# EAGLE board Open-Source_Control_V2_R2 (EAGLE 9.3.0), part 1 of 3
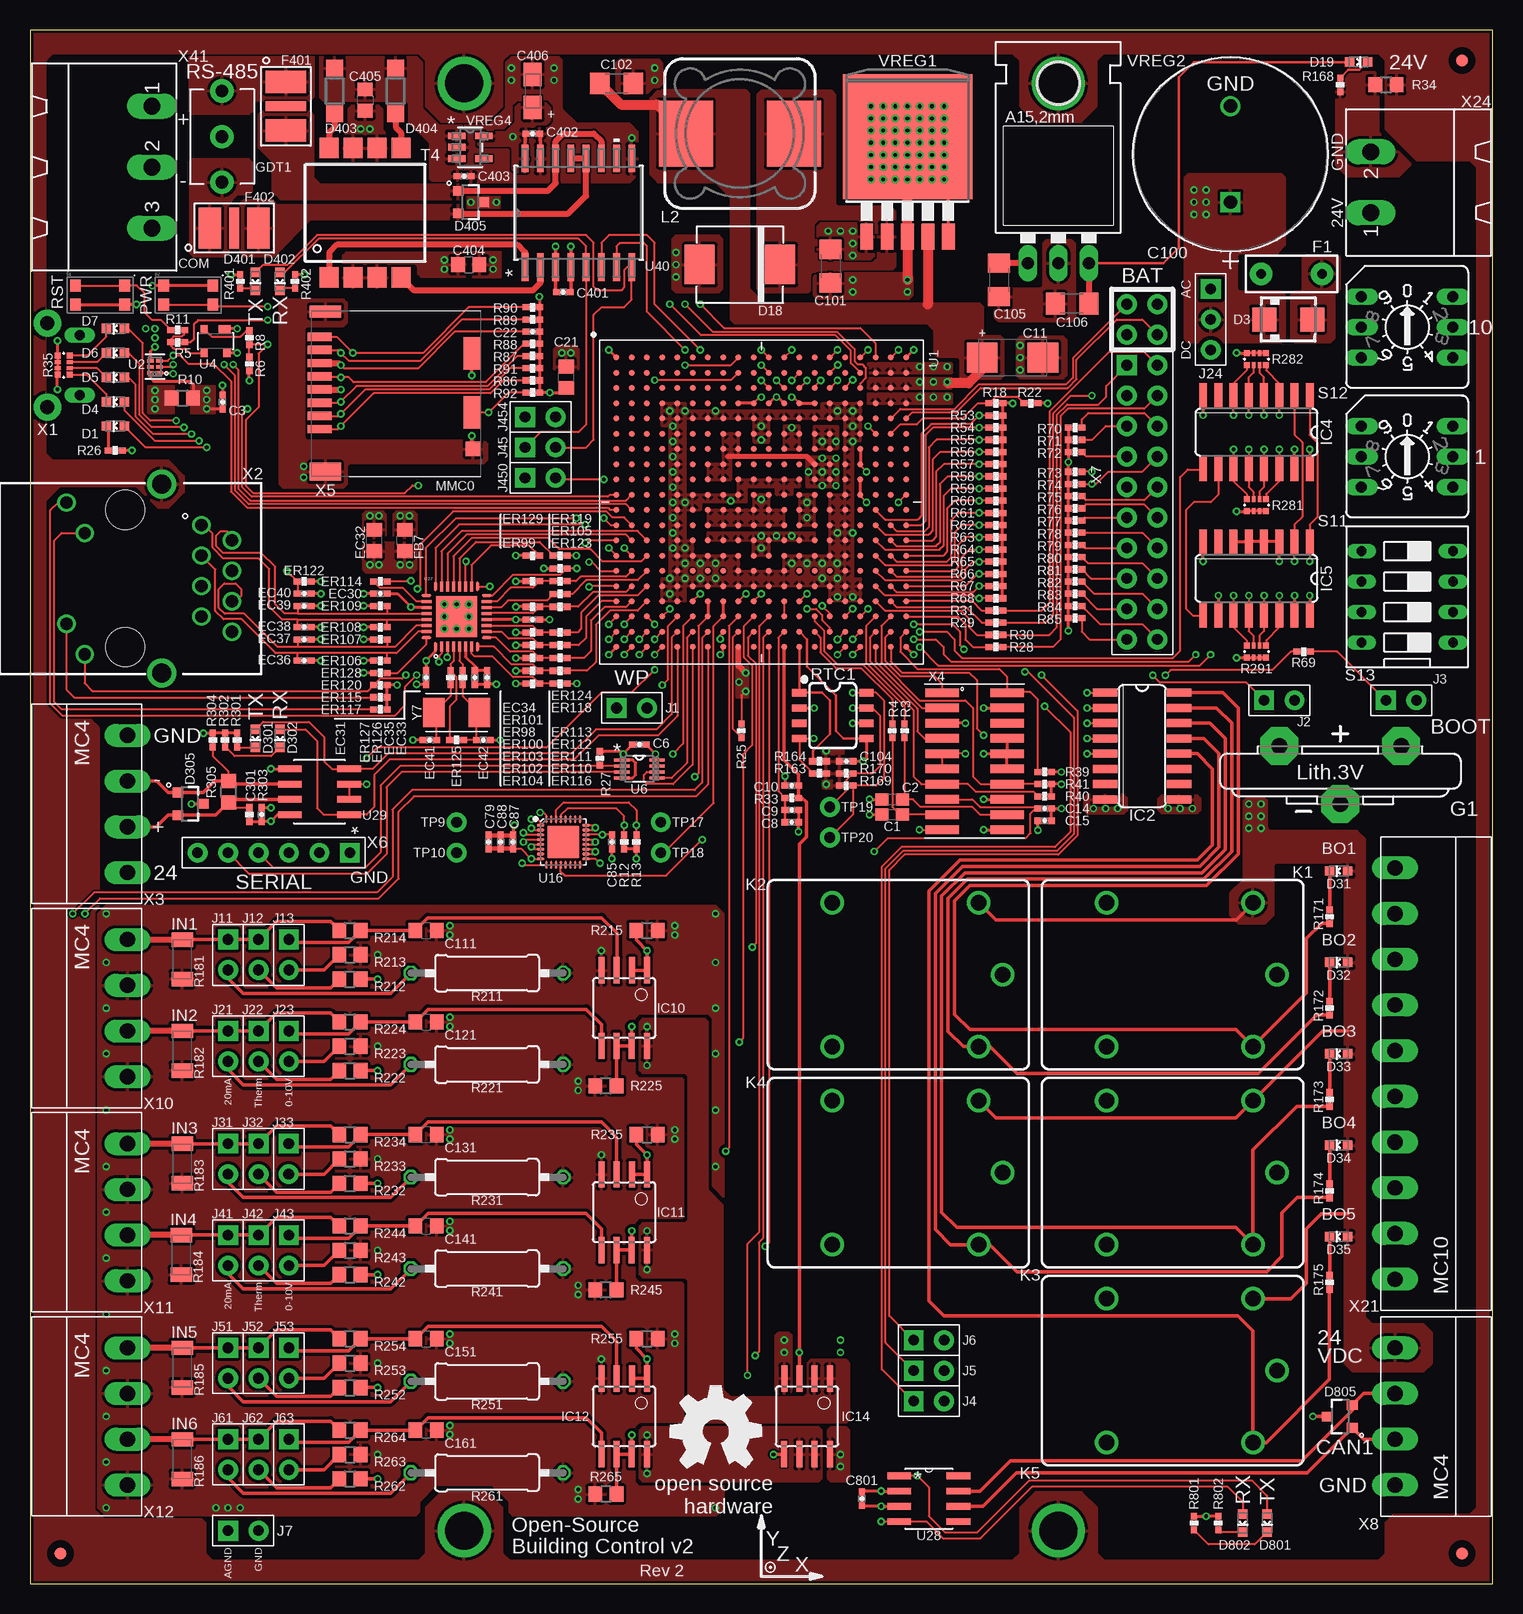
[diagram p0: board, top side]
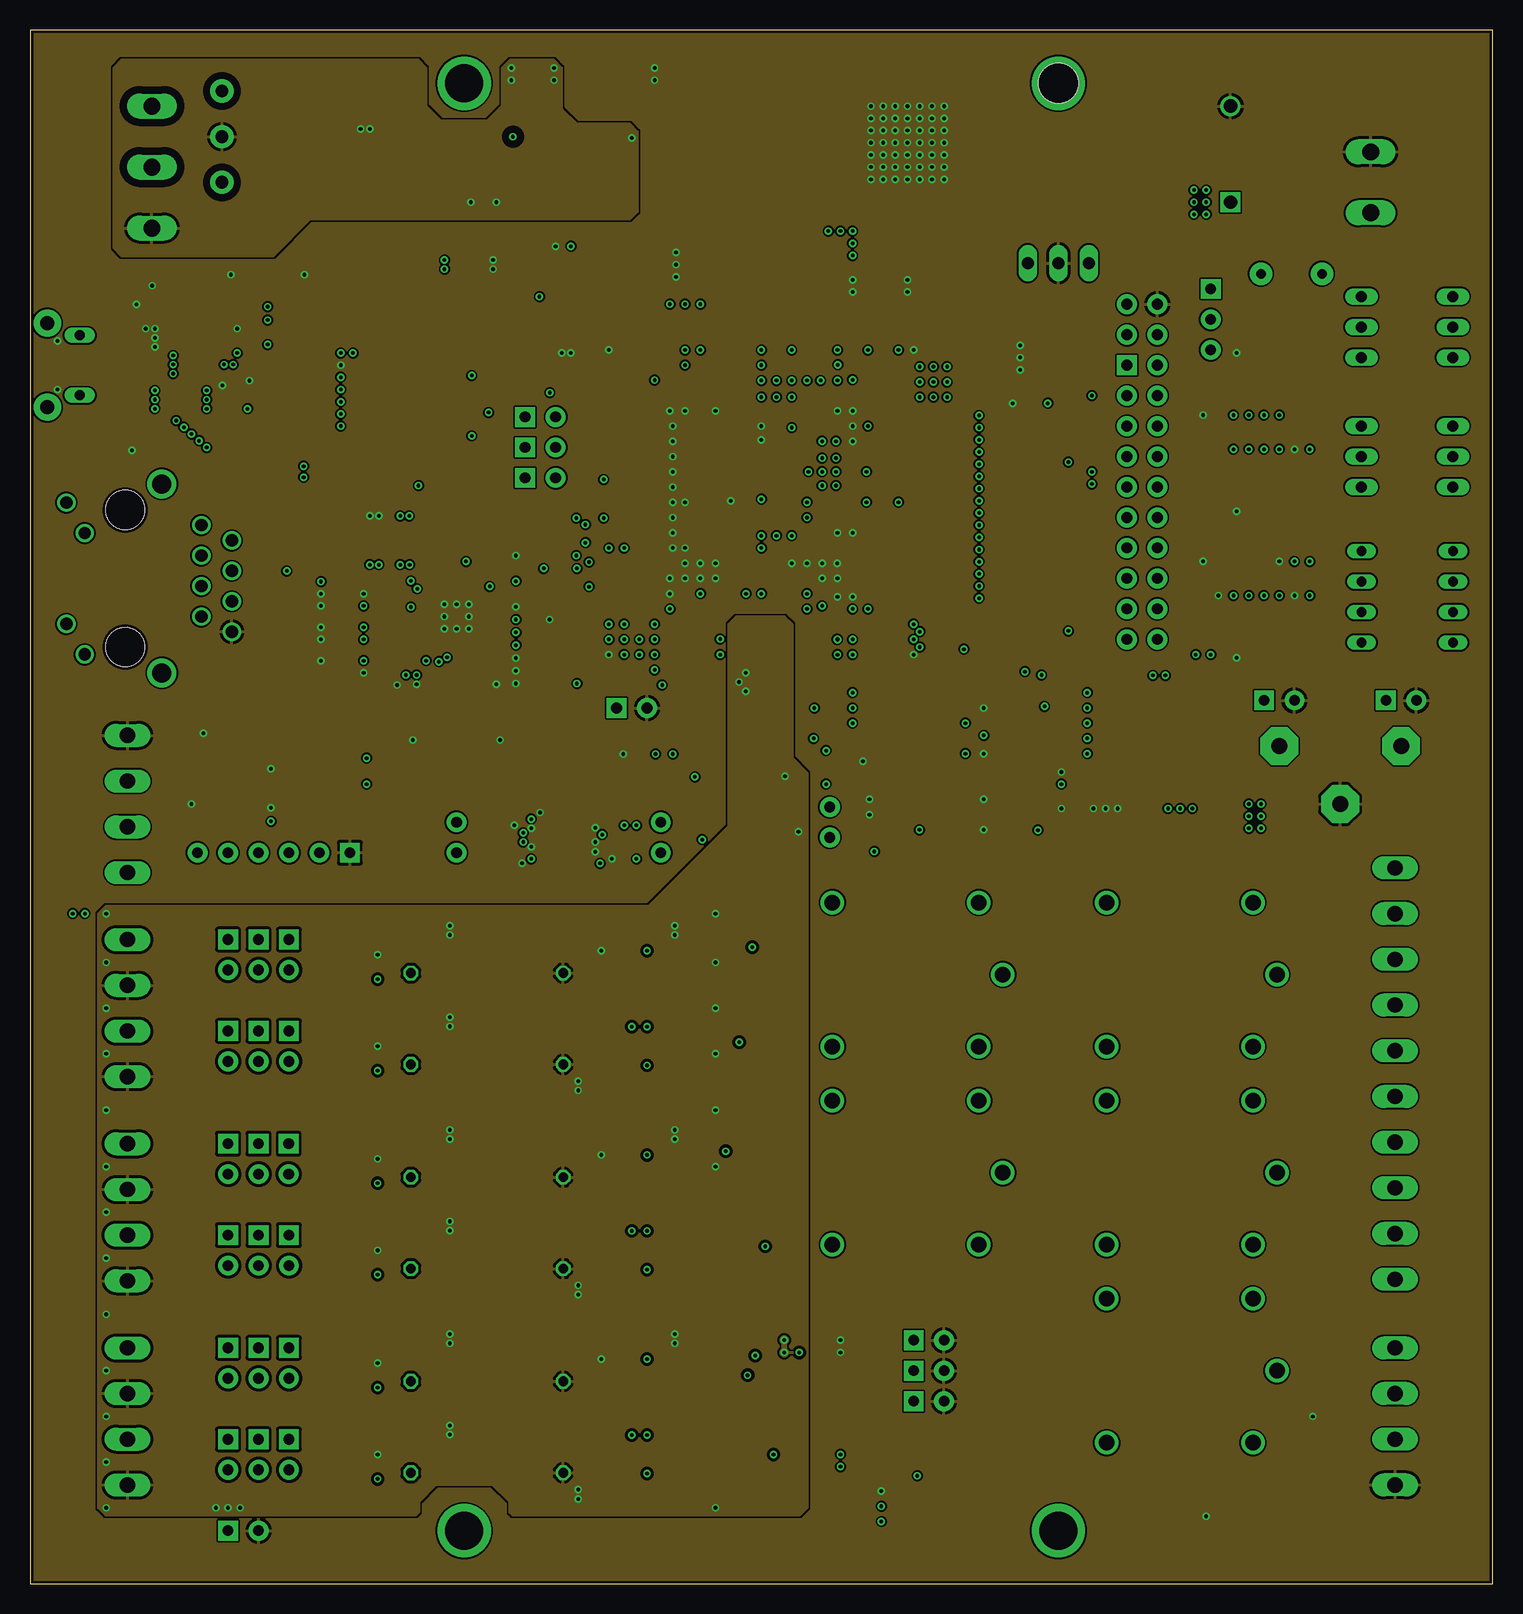
[diagram p1: board, inner layer Route2]
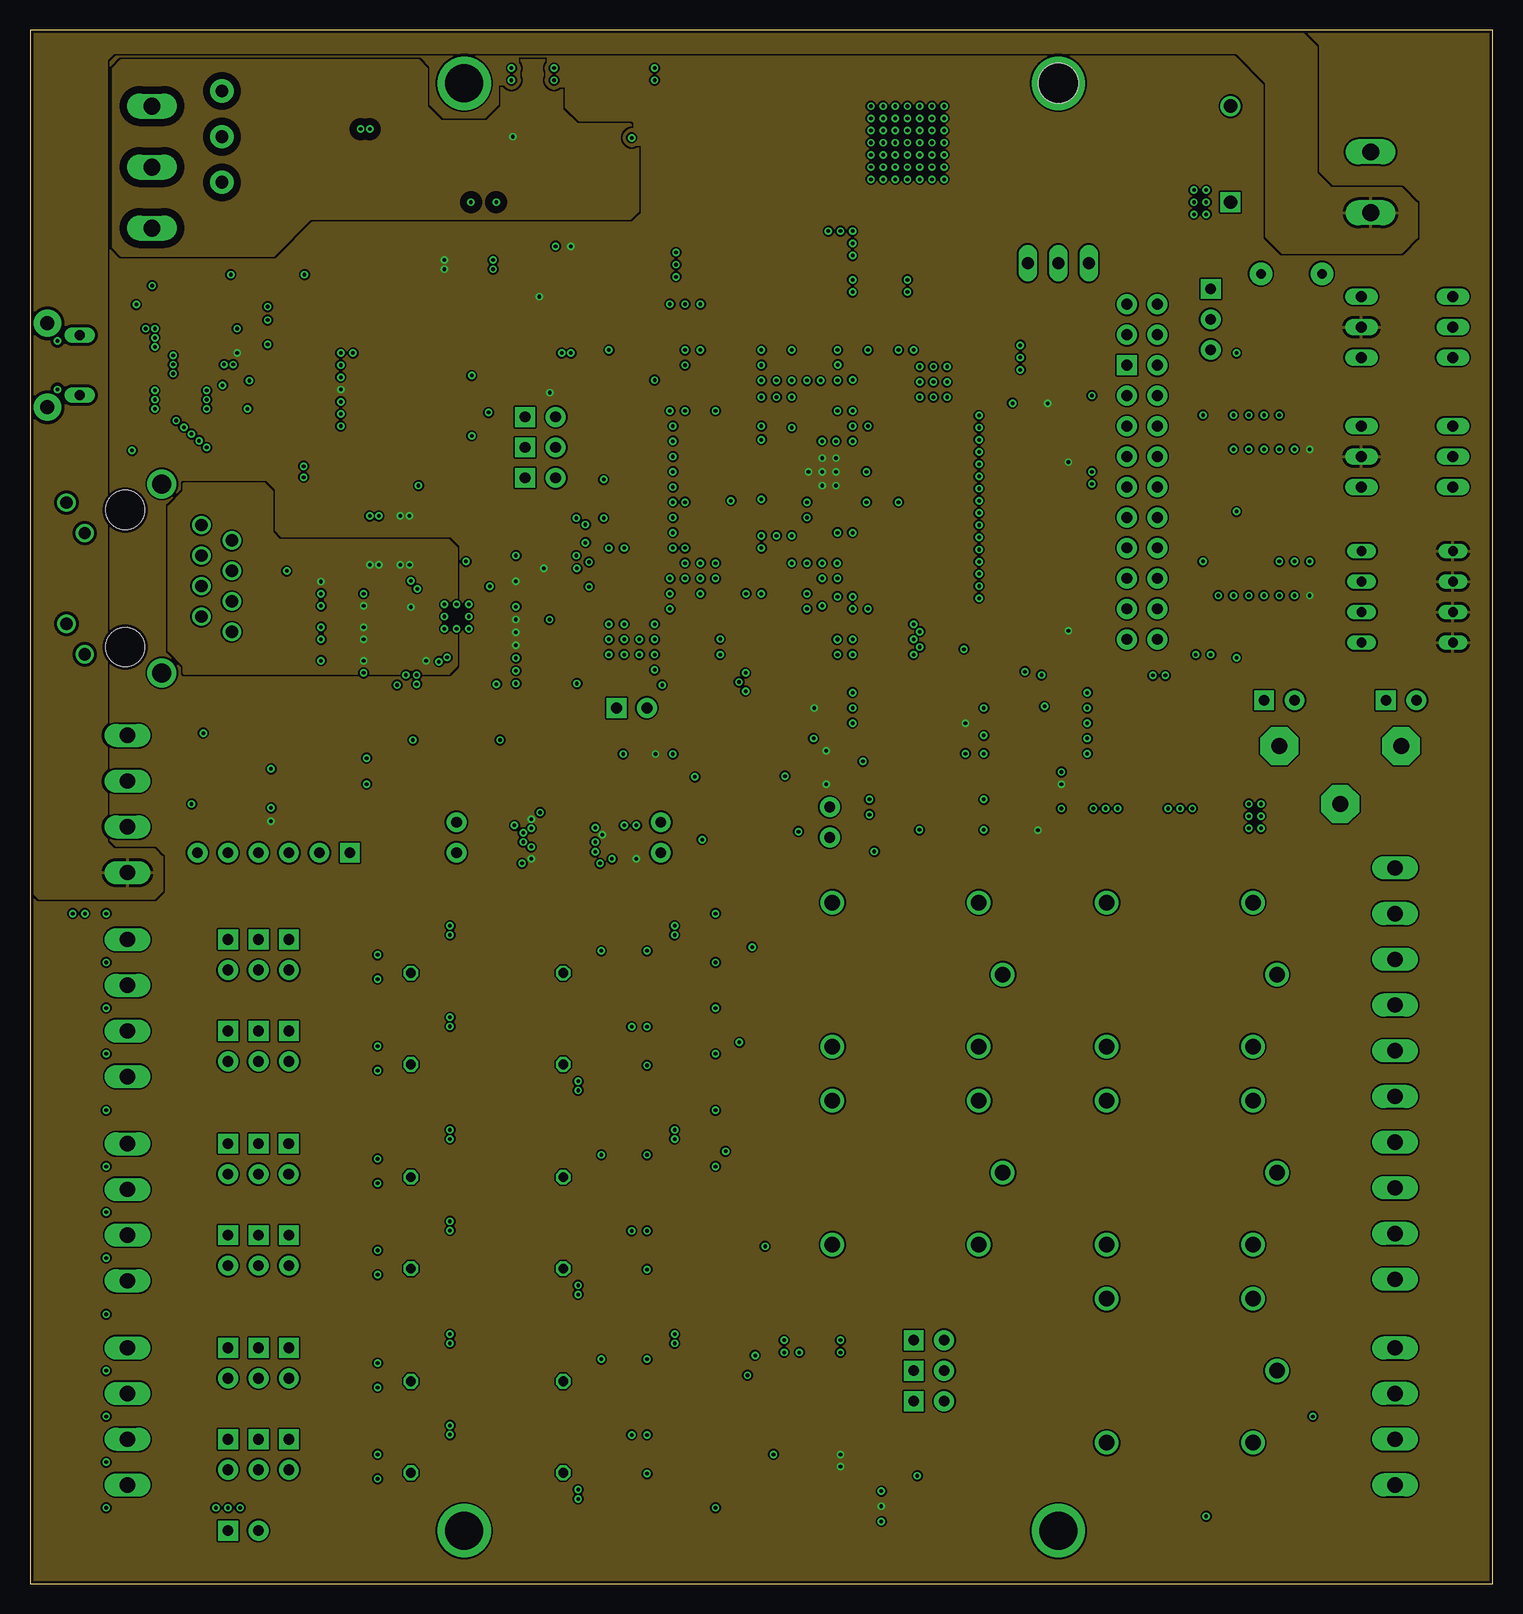
[diagram p2: board, inner layer Route15]
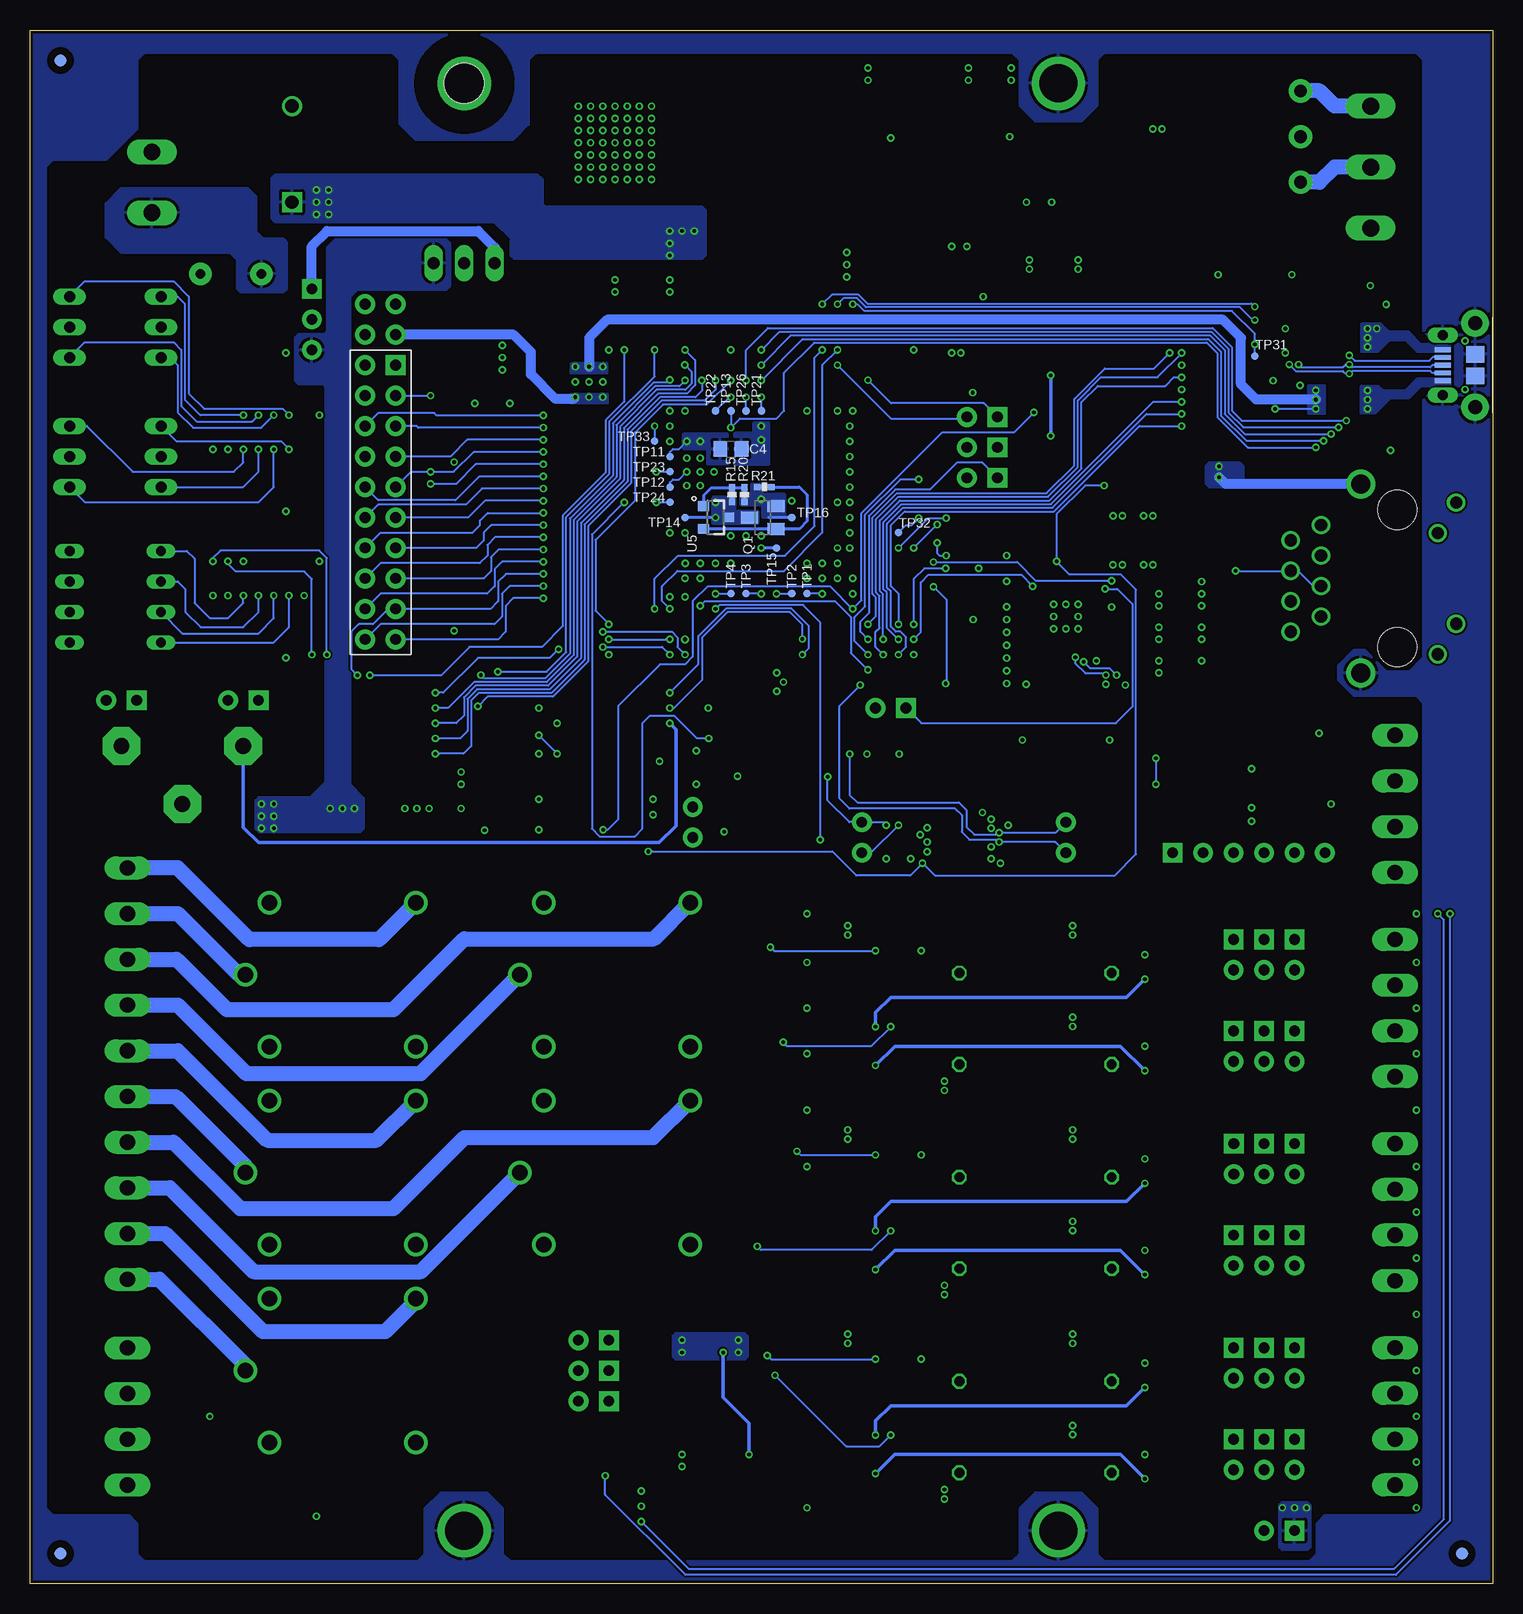
[diagram p3: board, bottom side, seen from below]

Size 121.92 x 129.54 mm. Coordinates in mm from the lower left corner, seen from the top.
Outline: 0,0 121.92,0 121.92,129.54 0,129.54 0,0
Copper layers (1*2*15*16): Top 0.035mm / dielectric 0.23mm / Route2 0.035mm / dielectric 0.93mm / Route15 0.035mm / dielectric 0.23mm / Bottom 0.035mm
Design rules "MF_Standard_4_Layer *": minimum track width 6mil, minimum drill 12mil, track to track 6mil, track to pad 6mil, pad to pad 6mil, via to via 6mil, smd to smd 0mil, copper to edge 10mil, drill to drill 10mil, minimum pad ring 6mil, minimum via ring 6mil, stop-mask expansion 2mil, vias tented up to drill 25mil, thermal gap 10mil
Net classes: 0 default: width 0.127 mm, drill 0.254 mm; 1 ground: width 0.152 mm, drill 0.254 mm, clearance 0.152 mm

## Footprints (pad centres in the part's own frame; a part is rotated, then mirrored left to right if it is on the bottom)
C0603 = smd 1.1 x 1: 1 -0.85,0; 2 0.85,0
C0402 = smd 0.61 x 0.508: 1 -0.559,0; 2 0.559,0
C0805 = smd 1.143 x 1.27: 1 -0.889,0; 2 0.889,0
C/6032-28R = smd 2.55 x 2.5: + 2.525,0; - -2.525,0
PCAP_16X25-THRU-ELECT = drill 1.118 pad 1.524 square: 1 -8.001,0 | drill 1.118 pad 1.524: 2 0,0
1206 = smd 1.6 x 1.8: 1 -1.4,0; 2 1.4,0
A/3216-18R = smd 1.95 x 1.5: + 1.375,0; - -1.375,0
EIA-STD = smd 0.787 x 0.787: 1 -0.749,0; 2 0.749,0
SMA = smd 2 x 2: A 2,0; C -2,0
SMC = smd 2.5 x 3.3: A 3.35,0; C -3.35,0
SOT23-3 = smd 0.8 x 0.9: 1 -0.95,-1; 2 0.95,-1; 3 0,1.1
SOD123 = smd 1.4 x 1.4: A 1.9,0; C -1.9,0
R0402 = smd 0.61 x 0.508: 1 -0.559,0; 2 0.559,0
PTH = drill 0.8 pad 1.88: P$1 -2.54,0; P$2 2.54,0
TBU-CA = smd 1.88 x 3.404: 1 -2.032,0; 3 2.032,0 | smd 0.813 x 3.404: 2 0,0
FIDUCIAL_40MIL = smd 1.016 x 1.016: P$1 0,0
CR2032V = drill 1.321 pad 3.15 octagon: + -2.54,-5.08; +@1 -2.54,5.08; - 2.286,0
2036-XX-B3 = drill 1.067 pad 1.93: 1 0,-3.81; 2 0,3.81; 3 0,0
SO16 = smd 0.66 x 2.032: 1 -4.445,-3.073; 2 -3.175,-3.073; 3 -1.905,-3.073; 4 -0.635,-3.073; 5 0.635,-3.073; 6 1.905,-3.073; 7 3.175,-3.073; 8 4.445,-3.073; 9 4.445,3.073; 10 3.175,3.073; 11 1.905,3.073; 12 0.635,3.073; 13 -0.635,3.073; 14 -1.905,3.073; 15 -3.175,3.073; 16 -4.445,3.073
SOIC8 = smd 0.5 x 2.2: 1 -1.905,-3.154; 2 -0.645,-3.154; 3 0.625,-3.154; 4 1.895,-3.154; 5 1.905,3.154; 6 0.635,3.154; 7 -0.635,3.154; 8 -1.905,3.154
H2-2.54 = drill 0.889 pad 1.651 square: 1 0,1.27 | drill 0.889 pad 1.651: 2 0,-1.27
H3-2.54 = drill 0.889 pad 1.651 square: 1 0,2.54 | drill 0.889 pad 1.651: 2 0,0; 3 0,-2.54
JS-M = drill 1.3: 1 6.7,6; 2 6.7,-6; C 8.7,0; NC -5.5,-6; NO -5.5,6
MSS1260 = smd 5.5 x 4.5: 1 0,4.5; 2 0,-4.5
MOUNTING_HOLE = drill 3.175 pad 4.445: P$1 0,0
SOT23-BEC = smd 1 x 1.4: B -0.95,-1.1; C 0,1.1; E 0.95,-1.1
R0805 = smd 1.143 x 1.27: 1 -0.889,0; 2 0.889,0
RN0804 = smd 0.498 x 0.5: 1 -0.801,-0.5; 4 0.801,-0.5; 5 0.801,0.5; 8 -0.801,0.5 | smd 0.3 x 0.5: 2 -0.25,-0.5; 3 0.25,-0.5; 6 0.25,0.5; 7 -0.25,0.5
CT/CN1206 = smd 1.2 x 1.8: 1 -1.65,0; 2 1.65,0
0309/12 = drill 0.813 octagon: 1 -6.35,0; 2 6.35,0
SO08 = smd 0.6 x 1.2: 1 -1.905,-2.8; 2 -0.635,-2.8; 3 0.635,-2.8; 4 1.905,-2.8; 5 1.905,2.8; 6 0.635,2.8; 7 -0.635,2.8; 8 -1.905,2.8
SW4SMD_63X161LS = smd 0.9 x 1: 1 2.05,0.8; 2 2.05,-0.8; 3 -2.05,0.8; 4 -2.05,-0.8
P101 = drill 0.914 long: 1 3.81,-2.54; 2 -3.81,2.54; 4 3.81,2.54; 8 -3.81,-2.54; C 3.81,0; C1 -3.81,0
DS-04 = drill 0.813 long: 1 -3.81,-3.81; 2 -1.27,-3.81; 3 1.27,-3.81; 4 3.81,-3.81; 5 3.81,3.81; 6 1.27,3.81; 7 -1.27,3.81; 8 -3.81,3.81
DA230X-AL = smd 1.7 x 1.6: P$1 -5.4,3; P$2 -5.4,1; P$3 -5.4,-1; P$4 -5.4,-3; P$5 5.4,-3; P$6 5.4,-1; P$7 5.4,1; P$8 5.4,3
TP_B0,65 = smd 0.635 x 0.635: TP 0,0
TESTPAD/W_HOLE_1X1 = drill 0.889 pad 1.651: P$1 0,0
OSD335X-BGA-400 = smd 0.5 x 0.5: A1 -12.065,-12.065; A2 -12.065,-10.795; A3 -12.065,-9.525; A4 -12.065,-8.255; A5 -12.065,-6.985; A6 -12.065,-5.715; A7 -12.065,-4.445; A8 -12.065,-3.175; A9 -12.065,-1.905; A10 -12.065,-0.635; A11 -12.065,0.635; A12 -12.065,1.905; A13 -12.065,3.175; A14 -12.065,4.445; A15 -12.065,5.715; A16 -12.065,6.985; A17 -12.065,8.255; A18 -12.065,9.525; A19 -12.065,10.795; A20 -12.065,12.065; B1 -10.795,-12.065; B2 -10.795,-10.795; B3 -10.795,-9.525; B4 -10.795,-8.255; B5 -10.795,-6.985; B6 -10.795,-5.715; B7 -10.795,-4.445; B8 -10.795,-3.175; B9 -10.795,-1.905; B10 -10.795,-0.635; B11 -10.795,0.635; B12 -10.795,1.905; B13 -10.795,3.175; B14 -10.795,4.445; B15 -10.795,5.715; B16 -10.795,6.985; B17 -10.795,8.255; B18 -10.795,9.525; B19 -10.795,10.795; B20 -10.795,12.065; C1 -9.525,-12.065; C2 -9.525,-10.795; C3 -9.525,-9.525; C4 -9.525,-8.255; C5 -9.525,-6.985; C6 -9.525,-5.715; C7 -9.525,-4.445; C8 -9.525,-3.175; C9 -9.525,-1.905; C10 -9.525,-0.635; C11 -9.525,0.635; C12 -9.525,1.905; C13 -9.525,3.175; C14 -9.525,4.445; C15 -9.525,5.715; C16 -9.525,6.985; C17 -9.525,8.255; C18 -9.525,9.525; C19 -9.525,10.795; C20 -9.525,12.065; D1 -8.255,-12.065; D2 -8.255,-10.795; D3 -8.255,-9.525; D4 -8.255,-8.255; D5 -8.255,-6.985; D6 -8.255,-5.715; D7 -8.255,-4.445; D8 -8.255,-3.175; D9 -8.255,-1.905; D10 -8.255,-0.635; D11 -8.255,0.635; D12 -8.255,1.905; D13 -8.255,3.175; D14 -8.255,4.445; D15 -8.255,5.715; D16 -8.255,6.985; D17 -8.255,8.255; D18 -8.255,9.525; D19 -8.255,10.795; D20 -8.255,12.065; E1 -6.985,-12.065; E2 -6.985,-10.795; E3 -6.985,-9.525; E4 -6.985,-8.255; E5 -6.985,-6.985; E6 -6.985,-5.715; E7 -6.985,-4.445; E8 -6.985,-3.175; E9 -6.985,-1.905; E10 -6.985,-0.635; E11 -6.985,0.635; E12 -6.985,1.905; E13 -6.985,3.175; E14 -6.985,4.445; E15 -6.985,5.715; E16 -6.985,6.985; E17 -6.985,8.255; E18 -6.985,9.525; E19 -6.985,10.795; E20 -6.985,12.065; F1 -5.715,-12.065; F2 -5.715,-10.795; F3 -5.715,-9.525; F4 -5.715,-8.255; F5 -5.715,-6.985; F6 -5.715,-5.715; F7 -5.715,-4.445; F8 -5.715,-3.175; F9 -5.715,-1.905; F10 -5.715,-0.635; F11 -5.715,0.635; F12 -5.715,1.905; F13 -5.715,3.175; F14 -5.715,4.445; F15 -5.715,5.715; F16 -5.715,6.985; F17 -5.715,8.255; F18 -5.715,9.525; F19 -5.715,10.795; F20 -5.715,12.065; G1 -4.445,-12.065; G2 -4.445,-10.795; G3 -4.445,-9.525; G4 -4.445,-8.255; G5 -4.445,-6.985; G6 -4.445,-5.715; G7 -4.445,-4.445; G8 -4.445,-3.175; G9 -4.445,-1.905; G10 -4.445,-0.635; G11 -4.445,0.635; G12 -4.445,1.905; G13 -4.445,3.175; G14 -4.445,4.445; G15 -4.445,5.715; G16 -4.445,6.985; G17 -4.445,8.255; G18 -4.445,9.525; G19 -4.445,10.795; G20 -4.445,12.065; H1 -3.175,-12.065; H2 -3.175,-10.795; H3 -3.175,-9.525; H4 -3.175,-8.255; H5 -3.175,-6.985; H6 -3.175,-5.715; H7 -3.175,-4.445; H8 -3.175,-3.175; H9 -3.175,-1.905; H10 -3.175,-0.635; H11 -3.175,0.635; H12 -3.175,1.905; H13 -3.175,3.175; H14 -3.175,4.445; H15 -3.175,5.715; H16 -3.175,6.985; H17 -3.175,8.255; H18 -3.175,9.525; H19 -3.175,10.795; H20 -3.175,12.065; J1 -1.905,-12.065; J2 -1.905,-10.795; J3 -1.905,-9.525; J4 -1.905,-8.255; J5 -1.905,-6.985; J6 -1.905,-5.715; J7 -1.905,-4.445; J8 -1.905,-3.175; J9 -1.905,-1.905; J10 -1.905,-0.635; J11 -1.905,0.635; J12 -1.905,1.905; J13 -1.905,3.175; J14 -1.905,4.445; J15 -1.905,5.715; J16 -1.905,6.985; J17 -1.905,8.255; J18 -1.905,9.525; J19 -1.905,10.795; J20 -1.905,12.065; K1 -0.635,-12.065; K2 -0.635,-10.795; K3 -0.635,-9.525; K4 -0.635,-8.255; K5 -0.635,-6.985; K6 -0.635,-5.715; K7 -0.635,-4.445; K8 -0.635,-3.175; K9 -0.635,-1.905; K10 -0.635,-0.635; K11 -0.635,0.635; K12 -0.635,1.905; K13 -0.635,3.175; K14 -0.635,4.445; K15 -0.635,5.715; K16 -0.635,6.985; K17 -0.635,8.255; K18 -0.635,9.525; K19 -0.635,10.795; K20 -0.635,12.065; L1 0.635,-12.065; L2 0.635,-10.795; L3 0.635,-9.525; L4 0.635,-8.255; L5 0.635,-6.985; L6 0.635,-5.715; L7 0.635,-4.445; L8 0.635,-3.175; L9 0.635,-1.905; L10 0.635,-0.635; L11 0.635,0.635; L12 0.635,1.905; L13 0.635,3.175; L14 0.635,4.445; L15 0.635,5.715; L16 0.635,6.985; L17 0.635,8.255; L18 0.635,9.525; L19 0.635,10.795; L20 0.635,12.065; M1 1.905,-12.065; M2 1.905,-10.795; M3 1.905,-9.525; M4 1.905,-8.255; M5 1.905,-6.985; M6 1.905,-5.715; M7 1.905,-4.445; M8 1.905,-3.175; M9 1.905,-1.905; M10 1.905,-0.635; M11 1.905,0.635; M12 1.905,1.905; M13 1.905,3.175; M14 1.905,4.445; M15 1.905,5.715; M16 1.905,6.985; M17 1.905,8.255; M18 1.905,9.525; M19 1.905,10.795; M20 1.905,12.065; N1 3.175,-12.065; N2 3.175,-10.795; N3 3.175,-9.525; N4 3.175,-8.255; N5 3.175,-6.985; N6 3.175,-5.715; N7 3.175,-4.445; N8 3.175,-3.175; N9 3.175,-1.905; N10 3.175,-0.635; N11 3.175,0.635; N12 3.175,1.905; N13 3.175,3.175; N14 3.175,4.445; N15 3.175,5.715; N16 3.175,6.985; N17 3.175,8.255; N18 3.175,9.525; N19 3.175,10.795; N20 3.175,12.065; P1 4.445,-12.065; P2 4.445,-10.795; P3 4.445,-9.525; P4 4.445,-8.255; P5 4.445,-6.985; P6 4.445,-5.715; P7 4.445,-4.445; P8 4.445,-3.175; P9 4.445,-1.905; P10 4.445,-0.635; P11 4.445,0.635; P12 4.445,1.905; P13 4.445,3.175; P14 4.445,4.445; P15 4.445,5.715; P16 4.445,6.985; P17 4.445,8.255; P18 4.445,9.525; P19 4.445,10.795; P20 4.445,12.065; R1 5.715,-12.065; R2 5.715,-10.795; R3 5.715,-9.525; R4 5.715,-8.255; R5 5.715,-6.985; R6 5.715,-5.715; R7 5.715,-4.445; R8 5.715,-3.175; R9 5.715,-1.905; R10 5.715,-0.635; R11 5.715,0.635; R12 5.715,1.905; R13 5.715,3.175; R14 5.715,4.445; R15 5.715,5.715; R16 5.715,6.985; R17 5.715,8.255; R18 5.715,9.525; R19 5.715,10.795; R20 5.715,12.065; T1 6.985,-12.065; T2 6.985,-10.795; T3 6.985,-9.525; T4 6.985,-8.255; T5 6.985,-6.985; T6 6.985,-5.715; T7 6.985,-4.445; T8 6.985,-3.175; T9 6.985,-1.905; T10 6.985,-0.635; T11 6.985,0.635; T12 6.985,1.905; T13 6.985,3.175; T14 6.985,4.445; T15 6.985,5.715; T16 6.985,6.985; T17 6.985,8.255; T18 6.985,9.525; T19 6.985,10.795; T20 6.985,12.065; U1 8.255,-12.065; U2 8.255,-10.795; U3 8.255,-9.525; U4 8.255,-8.255; U5 8.255,-6.985; U6 8.255,-5.715; U7 8.255,-4.445; U8 8.255,-3.175; U9 8.255,-1.905; U10 8.255,-0.635; U11 8.255,0.635; U12 8.255,1.905; U13 8.255,3.175; U14 8.255,4.445; U15 8.255,5.715; U16 8.255,6.985; U17 8.255,8.255; U18 8.255,9.525; U19 8.255,10.795; U20 8.255,12.065; V1 9.525,-12.065; V2 9.525,-10.795; V3 9.525,-9.525; V4 9.525,-8.255; V5 9.525,-6.985; V6 9.525,-5.715; V7 9.525,-4.445; V8 9.525,-3.175; V9 9.525,-1.905; V10 9.525,-0.635; V11 9.525,0.635; V12 9.525,1.905; V13 9.525,3.175; V14 9.525,4.445; V15 9.525,5.715; V16 9.525,6.985; V17 9.525,8.255; V18 9.525,9.525; V19 9.525,10.795; V20 9.525,12.065; W1 10.795,-12.065; W2 10.795,-10.795; W3 10.795,-9.525; W4 10.795,-8.255; W5 10.795,-6.985; W6 10.795,-5.715; W7 10.795,-4.445; W8 10.795,-3.175; W9 10.795,-1.905; W10 10.795,-0.635; W11 10.795,0.635; W12 10.795,1.905; W13 10.795,3.175; W14 10.795,4.445; W15 10.795,5.715; W16 10.795,6.985; W17 10.795,8.255; W18 10.795,9.525; W19 10.795,10.795; W20 10.795,12.065; Y1 12.065,-12.065; Y2 12.065,-10.795; Y3 12.065,-9.525; Y4 12.065,-8.255; Y5 12.065,-6.985; Y6 12.065,-5.715; Y7 12.065,-4.445; Y8 12.065,-3.175; Y9 12.065,-1.905; Y10 12.065,-0.635; Y11 12.065,0.635; Y12 12.065,1.905; Y13 12.065,3.175; Y14 12.065,4.445; Y15 12.065,5.715; Y16 12.065,6.985; Y17 12.065,8.255; Y18 12.065,9.525; Y19 12.065,10.795; Y20 12.065,12.065
DRY6 = smd 0.55 x 0.3: 1 -0.355,0.5 | smd 0.52 x 0.3: 2 -0.37,0; 3 -0.37,-0.5; 4 0.37,-0.5; 5 0.37,0; 6 0.37,0.5
SOT143-R = smd 1 x 0.7: 1 -0.75,-1 | smd 0.6 x 0.7: 2 0.95,-1; 3 0.95,1; 4 -0.95,1
DCU8 = smd 1.27 x 0.254: 1 -1.473,0.749; 2 -1.473,0.249; 3 -1.473,-0.249; 4 -1.473,-0.749; 5 1.473,-0.749; 6 1.473,-0.249; 7 1.473,0.249; 8 1.473,0.749
QFN32-0.4-4X4MM = smd 0.6 x 0.2: 1 -1.9,1.4; 2 -1.9,1; 3 -1.9,0.6; 4 -1.9,0.2; 5 -1.9,-0.2; 6 -1.9,-0.6; 7 -1.9,-1; 8 -1.9,-1.4; 17 1.9,-1.4; 18 1.9,-1; 19 1.9,-0.6; 20 1.9,-0.2; 21 1.9,0.2; 22 1.9,0.6; 23 1.9,1; 24 1.9,1.4 | smd 0.2 x 0.6: 9 -1.4,-1.9; 10 -1,-1.9; 11 -0.6,-1.9; 12 -0.2,-1.9; 13 0.2,-1.9; 14 0.6,-1.9; 15 1,-1.9; 16 1.4,-1.9; 25 1.4,1.9; 26 1,1.9; 27 0.6,1.9; 28 0.2,1.9; 29 -0.2,1.9; 30 -0.6,1.9; 31 -1,1.9; 32 -1.4,1.9 | smd 2.7 x 2.7: 33 0,0
LAN8710A-QFN32 = smd 0.254 x 0.838: 1 -1.751,-2.515; 2 -1.251,-2.515; 3 -0.751,-2.515; 4 -0.251,-2.515; 5 0.251,-2.515; 6 0.751,-2.515; 7 1.251,-2.515; 8 1.751,-2.515; 17 1.751,2.515; 18 1.251,2.515; 19 0.751,2.515; 20 0.251,2.515; 21 -0.251,2.515; 22 -0.751,2.515; 23 -1.251,2.515; 24 -1.751,2.515 | smd 0.838 x 0.254: 9 2.515,-1.751; 10 2.515,-1.251; 11 2.515,-0.751; 12 2.515,-0.251; 13 2.515,0.251; 14 2.515,0.751; 15 2.515,1.251; 16 2.515,1.751; 25 -2.515,1.751; 26 -2.515,1.251; 27 -2.515,0.751; 28 -2.515,0.251; 29 -2.515,-0.251; 30 -2.515,-0.751; 31 -2.515,-1.251; 32 -2.515,-1.751 | smd 3.404 x 3.404: 33 0,0
BEAGLEBONE_BLUE_D8 = smd 1.981 x 0.559: 1 -2.464,1.905; 2 -2.464,0.635; 3 -2.464,-0.635; 4 -2.464,-1.905; 5 2.464,-1.905; 6 2.464,-0.635; 7 2.464,0.635; 8 2.464,1.905
21-0041B_8 = smd 1.981 x 0.533: 1 -2.464,1.905; 2 -2.464,0.635; 3 -2.464,-0.635; 4 -2.464,-1.905; 5 2.464,-1.905; 6 2.464,-0.635; 7 2.464,0.635; 8 2.464,1.905
DW16 = smd 2.311 x 0.559: 1 -4.521,4.445; 2 -4.521,3.175; 3 -4.521,1.905; 4 -4.521,0.635; 5 -4.521,-0.635; 6 -4.521,-1.905; 7 -4.521,-3.175; 8 -4.521,-4.445; 9 4.521,-4.445; 10 4.521,-3.175; 11 4.521,-1.905; 12 4.521,-0.635; 13 4.521,0.635; 14 4.521,1.905; 15 4.521,3.175; 16 4.521,4.445
TO263-5 = smd 1.067 x 2.159: 1 -3.404,-5.791; 2 -1.702,-5.791; 3 0,-5.791; 4 1.702,-5.791; 5 3.404,-5.791 | smd 10.8 x 10.41: 6 0,2.54
78XXL = drill 1.016 long: GND 0,-3.81; IN -2.54,-3.81; OUT 2.54,-3.81 | hole 3.302: 0,11.176
DBV5 = smd 1.473 x 0.559: 1 -1.118,0.95; 2 -1.118,0; 3 -1.118,-0.95; 4 1.118,-0.95; 5 1.118,0.95
10118194-0001LF(MICRO-USB-B-AMPHENOL-FCI) = drill 1.15 pad 2.286: CGND1 0,3.5; CGND4 0,-3.5 | smd 1.5 x 1.35: CGND2 0,0.9; CGND3 0,-0.9 | drill 0.85 long: CGND5 2.7,-2.5; CGND6 2.7,2.5 | smd 1.35 x 0.4: D+ 2.7,0; D- 2.7,0.65; GND 2.7,-1.3; ID 2.7,-0.65; VBUS 2.7,1.3
J0011D01BNL = drill 1.016 pad 1.524: 1 4.445,-6.413; 2 3.175,-8.954; 3 1.905,-6.413; 4 0.635,-8.954; 5 -0.635,-6.413; 6 -1.905,-8.954; 7 -3.175,-6.413; 8 -4.445,-8.954; 9 6.325,4.839; 10 3.785,3.315; 11 -3.785,4.839; 12 -6.325,3.315 | drill 1.6 pad 2.286: S1 -7.874,-3.111; S2 7.874,-3.111 | hole 3.251: -5.715,-0.064; 5.715,-0.064
MC4 = drill 1.27 long: 1 -5.715,0; 2 -1.905,0; 3 1.905,0; 4 5.715,0
CTI-JTAG = smd 2.794 x 0.711: 1 -2.705,5.715; 2 2.705,5.715; 3 -2.705,4.445; 4 2.705,4.445; 5 -2.705,3.175; 6 2.705,3.175; 7 -2.705,1.905; 8 2.705,1.905; 9 -2.705,0.635; 10 2.705,0.635; 11 -2.705,-0.635; 12 2.705,-0.635; 13 -2.705,-1.905; 14 2.705,-1.905; 15 -2.705,-3.175; 16 2.705,-3.175; 17 -2.705,-4.445; 18 2.705,-4.445; 19 -2.705,-5.715; 20 2.705,-5.715
DM3CS-SF = smd 0.7 x 2: 1 0,0; 2 -1.1,0; 3 -2.2,0; 4 -3.3,0; 5 -4.4,0; 6 -5.5,0; 7 -6.6,0; 8 -7.7,0 | smd 1 x 2.6: 9 -9.8,0.5 | smd 1.5 x 2.6: 10 3.55,0.5 | smd 1.2 x 1.2: 11 1.65,12.8 | smd 2.7 x 1.4: 12 -1.4,12.7; 13 -6.3,12.7
H6-2.54 = drill 0.889 pad 1.651 square: 1 0,6.35 | drill 0.889 pad 1.651: 2 0,3.81; 3 0,1.27; 4 0,-1.27; 5 0,-3.81; 6 0,-6.35
H2X10-2.54 = drill 0.889 pad 1.651 square: 1 -1.27,11.43 | drill 0.889 pad 1.651: 2 1.27,11.43; 3 -1.27,8.89; 4 1.27,8.89; 5 -1.27,6.35; 6 1.27,6.35; 7 -1.27,3.81; 8 1.27,3.81; 9 -1.27,1.27; 10 1.27,1.27; 11 -1.27,-1.27; 12 1.27,-1.27; 13 -1.27,-3.81; 14 1.27,-3.81; 15 -1.27,-6.35; 16 1.27,-6.35; 17 -1.27,-8.89; 18 1.27,-8.89; 19 -1.27,-11.43; 20 1.27,-11.43
MC10 = drill 1.27 long: 1 -17.145,0; 2 -13.335,0; 3 -9.525,0; 4 -5.715,0; 5 -1.905,0; 6 1.905,0; 7 5.715,0; 8 9.525,0; 9 13.335,0; 10 17.145,0
MSTBA2 = drill 1.397 long: 1 -2.54,5.08; 2 2.54,5.08
MSTBA3 = drill 1.397 long: 1 -5.08,5.08; 2 0,5.08; 3 5.08,5.08
CRYSTAL-TXC-7A = smd 1.788 x 2.413: P$1 1.9,0; P$2 -1.9,0

## Placement (x,y rotation side)
C1  DNI  [C0603]  71.88,64.14 0 top
C2  DNI  [C0603]  71.88,65.41 0 top
C3  0.1uF, 6.3V  [C0402]  16.05,98.53 90 top
C4  47uF  [C0805]  63.5,94.61 0 bottom
C6  0.1uF, 6.3V  [C0402]  50.8,69.98 0 top
C8  1nF  [C0402]  63.5,63.5 0 top
C9  0.1uF, 6.3V  [C0402]  63.5,64.52 0 top
C10  0.1uF, 6.3V  [C0402]  63.5,66.55 180 top
C11  220uF, 6.3V, T491C227K006AT  [C/6032-28R]  81.92,102.23 180 top
C14  0.1uF, 6.3V  [C0402]  84.58,64.64 0 top
C15  0.1uF, 6.3V  [C0402]  84.58,63.63 0 top
C21  10uF, 10V  [C0805]  44.7,100.58 90 top
C22  0.1uF, 6.3V  [C0402]  41.91,104.39 180 top
C79  0.1uF, 6.3V  [C0402]  38.23,61.85 90 top
C85  2200pF, 6.3V  [C0402]  48.51,61.85 270 top
C87  2200pF, 6.3V  [C0402]  40.26,61.85 90 top
C88  2200pF, 6.3V  [C0402]  39.24,61.85 90 top
C100  1000uF, 50V, UHE1H102MHD6  [PCAP_16X25-THRU-ELECT]  100.08,123.19 90 top
C101  0.47uF, 100V, X7R  [1206]  66.73,109.86 270 top
C102  0.47uF, 100V, X7R  [1206]  48.9,125.09 0 top
C104  0.1uF, 6.3V  [C0402]  68.05,68.58 0 top
C105  0.47uF, 100V, X7R  [1206]  80.77,108.71 270 top
C106  0.1uF, 50V  [1206]  86.87,106.73 180 top
C111  1uF  [C0805]  33.02,54.48 0 top
C121  1uF  [C0805]  33.02,46.86 0 top
C131  1uF  [C0805]  33.02,37.47 0 top
C141  1uF  [C0805]  33.02,29.84 0 top
C151  1uF  [C0805]  33.02,20.45 0 top
C161  1uF  [C0805]  33.02,12.83 0 top
C301  0.1uF, 6.3V  [C0402]  19.3,64.14 90 top
C401  0.1uF, 16V  [C0402]  44.45,107.7 180 top
C402  0.1uF, 16V  [C0402]  41.91,120.9 0 top
C403  0.1uF, 16V  [C0402]  36.2,117.35 0 top
C404  10uF, 16V  [C0805]  36.58,109.98 0 top
C405  10uF, 16V  [C0805]  27.94,123.7 270 top
C406  4.7uF, 16V, T491A475K016AT  [A/3216-18R]  41.91,124.46 270 top
C801  0.1uF, 6.3V  [C0402]  69.34,7.11 90 top
D1  LTST-C191KFKT  [EIA-STD]  7.11,96.52 180 top
D3  S1D  [SMA]  104.88,105.41 0 top
D4  LTST-C191KGKT  [EIA-STD]  7.11,98.55 180 top
D5  LTST-C191KGKT  [EIA-STD]  7.11,100.58 180 top
D6  LTST-C191KGKT  [EIA-STD]  7.11,102.62 180 top
D7  LTST-C191KGKT  [EIA-STD]  7.11,104.65 180 top
D18  B550C-13-F  [SMC]  59.18,109.98 180 top
D19  LTST-C191KGKT  [EIA-STD]  110.74,126.87 0 top
D31  LTST-C191KGKT  [EIA-STD]  109.09,59.44 180 top
D32  LTST-C191KGKT  [EIA-STD]  109.09,51.82 180 top
D33  LTST-C191KGKT  [EIA-STD]  109.09,44.2 180 top
D34  LTST-C191KGKT  [EIA-STD]  109.09,36.58 180 top
D35  LTST-C191KGKT  [EIA-STD]  109.09,28.96 180 top
D301  LTST-C191KRKT  [EIA-STD]  18.8,70.48 270 top
D302  LTST-C191KGKT  [EIA-STD]  20.83,70.48 270 top
D305  SM712  [SOT23-3]  13.34,65.02 270 top
D401  LTST-C191KRKT  [EIA-STD]  18.8,108.58 270 top
D402  LTST-C191KGKT  [EIA-STD]  20.83,108.58 270 top
D403  MBR0520LT  [SOD123]  25.4,124.46 270 top
D404  MBR0520LT  [SOD123]  30.48,124.46 270 top
D405  SM712  [SOT23-3]  36.7,115.19 270 top
D801  LTST-C191KRKT  [EIA-STD]  103.12,5.08 270 top
D802  LTST-C191KGKT  [EIA-STD]  101.09,5.08 270 top
D805  CDSOT23-T24CAN  [SOT23-3]  109.22,13.97 90 top
EC30  0.1uF, 6.3V  [C0402]  29.21,82.55 180 top
EC31  0.1uF, 6.3V  [C0402]  33.02,75.56 270 top
EC32  10uF, 10V  [C0805]  28.7,87 90 top
EC33  1uF, 10V  [C0402]  38.1,75.56 270 top
EC34  0.1uF, 6.3V  [C0402]  41.91,80.39 0 top
EC35  470pF, 6.3V  [C0402]  37.08,75.56 270 top
EC36  15pF, DNI  [C0402]  22.86,76.96 0 top
EC37  15pF, DNI  [C0402]  22.86,78.74 0 top
EC38  15pF, DNI  [C0402]  22.86,79.76 0 top
EC39  15pF, DNI  [C0402]  22.86,81.53 0 top
EC40  0.022uF, 10V  [C0402]  22.86,82.55 0 top
EC41  30pF, 50V  [C0402]  33.32,70.36 180 top
EC42  30pF, 50V  [C0402]  37.8,70.36 0 top
ER98  1.5K, 1%  [R0402]  41.91,79.32 0 top
ER99  1.5K, 1%  [R0402]  41.91,83.59 0 top
ER100  1.5K, 1%  [R0402]  41.91,78.26 0 top
ER101  10K, 1%  [R0402]  41.91,81.46 180 top
ER102  10K, 1%  [R0402]  41.91,76.12 180 top
ER103  10K, 1%  [R0402]  41.91,77.19 180 top
ER104  10K, 1%  [R0402]  41.91,75.06 180 top
ER105  1.5K, 1%  [R0402]  44.2,84.66 0 top
ER106  49.9, 1%  [R0402]  29.21,76.96 0 top
ER107  49.9, 1%  [R0402]  29.21,78.74 0 top
ER108  49.9, 1%  [R0402]  29.21,79.76 0 top
ER109  49.9, 1%  [R0402]  29.21,81.53 0 top
ER110  100, 1%  [R0402]  44.2,76.12 0 top
ER111  100, 1%  [R0402]  44.2,77.19 0 top
ER112  100, 1%  [R0402]  44.2,78.26 0 top
ER113  100, 1%  [R0402]  44.2,79.32 0 top
ER114  100, 1%  [R0402]  29.21,83.57 0 top
ER115  470, 1%  [R0402]  29.21,73.91 180 top
ER116  100, 1%  [R0402]  44.2,75.06 0 top
ER117  470, 1%  [R0402]  29.21,72.9 180 top
ER118  100, 1%  [R0402]  44.2,81.46 0 top
ER119  100, 1%  [R0402]  44.2,85.72 0 top
ER120  10K, 1%  [R0402]  29.21,74.93 180 top
ER122  0, 1%  [R0402]  22.86,83.57 180 top
ER123  100, 1%  [R0402]  44.2,83.59 0 top
ER124  100, 1%  [R0402]  44.2,82.52 0 top
ER125  1M, 1%, DNI  [R0402]  35.56,70.36 0 top
ER126  0, 1%  [R0402]  36.07,75.56 270 top
ER127  10, 1%  [R0402]  35.05,75.56 270 top
ER128  12.1K, 1%  [R0402]  29.21,75.95 0 top
ER129  10K, 1%  [R0402]  41.91,85.72 180 top
F1  60V, 750mA, R075  [PTH]  105.16,109.22 0 top
F401  TBU-CA085-300-WH  [TBU-CA]  21.34,123.19 270 top
F402  TBU-CA085-300-WH  [TBU-CA]  17.02,113.03 0 top
FB7  150ohm, 800mA  [C0805]  31.24,87 270 top
FUD1  FIDUCIAL  [FIDUCIAL_40MIL]  119.38,2.54 0 top
FUD2  FIDUCIAL  [FIDUCIAL_40MIL]  119.38,127 0 top
FUD3  FIDUCIAL  [FIDUCIAL_40MIL]  2.54,2.54 0 top
FUD4  FIDUCIAL  [FIDUCIAL_40MIL]  119.38,127 90 bottom
FUD5  FIDUCIAL  [FIDUCIAL_40MIL]  2.54,2.54 90 bottom
FUD6  FIDUCIAL  [FIDUCIAL_40MIL]  119.38,2.54 90 bottom
G1  CR2032V  [CR2032V]  109.22,67.31 270 top
GDT1  2036-07-B3  [2036-XX-B3]  16,120.65 0 top
IC2  ULN2003AD  [SO16]  92.71,69.85 270 top
IC4  74HC165D  [SO16]  102.23,96.01 180 top
IC5  74HC165D  [SO16]  102.23,83.82 180 top
IC10  MCP6002SMT  [SOIC8]  49.53,48.01 180 top
IC11  MCP6002SMT  [SOIC8]  49.53,30.99 180 top
IC12  MCP6002SMT  [SOIC8]  49.53,13.97 180 top
IC14  MCP6002SMT  [SOIC8]  64.77,13.97 180 top
J1  [H2-2.54]  50.16,73.03 90 top
J2  [H2-2.54]  104.14,73.66 90 top
J3  [H2-2.54]  114.3,73.66 90 top
J4  [H2-2.54]  74.93,15.24 90 top
J5  [H2-2.54]  74.93,17.78 90 top
J6  [H2-2.54]  74.93,20.32 90 top
J7  [H2-2.54]  17.78,4.45 90 top
J11  [H2-2.54]  16.51,52.45 0 top
J12  [H2-2.54]  19.05,52.45 0 top
J13  [H2-2.54]  21.59,52.45 0 top
J21  [H2-2.54]  16.51,44.83 0 top
J22  [H2-2.54]  19.05,44.83 0 top
J23  [H2-2.54]  21.59,44.83 0 top
J24  6p-2.54  [H3-2.54]  98.42,105.41 0 top
J31  [H2-2.54]  16.51,35.43 0 top
J32  [H2-2.54]  19.05,35.43 0 top
J33  [H2-2.54]  21.56,35.43 0 top
J41  [H2-2.54]  16.51,27.81 0 top
J42  [H2-2.54]  19.05,27.81 0 top
J43  [H2-2.54]  21.59,27.81 0 top
J45  [H2-2.54]  42.55,94.74 90 top
J51  [H2-2.54]  16.51,18.41 0 top
J52  [H2-2.54]  19.05,18.41 0 top
J53  [H2-2.54]  21.59,18.41 0 top
J61  [H2-2.54]  16.51,10.79 0 top
J62  [H2-2.54]  19.05,10.79 0 top
J63  [H2-2.54]  21.59,10.79 0 top
J450  [H2-2.54]  42.55,92.2 90 top
J454  [H2-2.54]  42.55,97.28 90 top
K1  JS1-24V-F  [JS-M]  95.25,50.8 0 top
K2  JS1-24V-F  [JS-M]  72.39,50.8 0 top
K3  JS1-24V-F  [JS-M]  95.25,34.29 0 top
K4  JS1-24V-F  [JS-M]  72.39,34.29 0 top
K5  JS1-24V-F  [JS-M]  95.25,17.78 0 top
L2  MSS1260T-473ML  [MSS1260]  59.18,120.9 270 top
MGT1  MOUNTING_HOLE  [MOUNTING_HOLE]  36.2,4.45 0 top
MGT2  MOUNTING_HOLE  [MOUNTING_HOLE]  85.72,4.45 0 top
MGT3  MOUNTING_HOLE  [MOUNTING_HOLE]  36.2,125.09 0 top
MGT4  MOUNTING_HOLE  [MOUNTING_HOLE]  85.72,125.09 0 top
Q1  MMBT2907  [SOT23-BEC]  60.83,88.9 90 bottom
R3  0, 1%  [R0402]  72.9,71.12 270 top
R4  0, 1%  [R0402]  71.88,71.12 270 top
R5  0  [R0402]  12.32,103.5 180 top
R6  100K, DNI  [R0402]  18.29,101.7 90 top
R8  1K  [R0402]  18.29,103.89 90 top
R10  0, 1%  [R0805]  12.7,98.86 0 top
R11  0  [R0402]  12.32,104.52 0 top
R12  1.5K, 1%  [R0402]  49.53,61.85 270 top
R13  1.5K, 1%  [R0402]  50.55,61.85 270 top
R15  40.2K  [R0402]  63.4,90.81 90 bottom
R18  4.75K, 1%  [R0402]  80.52,98.42 180 top
R20  10K  [R0402]  62.36,90.81 270 bottom
R21  499  [R0402]  60.71,91.44 180 bottom
R22  4.75K, 1%  [R0402]  83.44,98.42 0 top
R25  0, 1%  [R0402]  59.31,71.12 90 top
R26  1.5K, 1%  [R0402]  7.11,94.49 0 top
R27  100K, 1%  [R0402]  47.5,68.83 270 top
R28  0, 1%  [R0402]  80.52,78.11 0 top
R29  0, 1%  [R0402]  80.52,80.14 0 top
R30  0, 1%  [R0402]  80.52,79.12 0 top
R31  22, 1%  [R0402]  80.52,81.15 0 top
R33  0, 1%  [R0402]  63.5,65.53 0 top
R34  .1, 0805  [R0805]  113.03,124.97 0 top
R35  1K  [RN0804]  2.79,101.6 270 top
R39  4.75K, 1%  [R0402]  84.58,67.69 180 top
R40  4.75K, 1%  [R0402]  84.58,65.66 0 top
R41  4.75K, 1%  [R0402]  84.58,66.67 0 top
R53  100K, 1%  [R0402]  80.52,97.41 180 top
R54  100K, 1%, DNI  [R0402]  80.52,96.39 180 top
R55  100K, 1%  [R0402]  80.52,95.38 180 top
R56  100K, 1%  [R0402]  80.52,94.36 180 top
R57  100K, 1%  [R0402]  80.52,93.34 180 top
R58  100K, 1%  [R0402]  80.52,92.33 180 top
R59  100K, 1%  [R0402]  80.52,91.31 180 top
R60  100K, 1%  [R0402]  80.52,90.3 180 top
R61  100K, 1%  [R0402]  80.52,89.28 180 top
R62  100K, 1%  [R0402]  80.52,88.27 180 top
R63  100K, 1%  [R0402]  80.52,87.25 180 top
R64  100K, 1%, DNI  [R0402]  80.52,86.23 180 top
R65  100K, 1%, DNI  [R0402]  80.52,85.22 180 top
R66  100K, 1%, DNI  [R0402]  80.52,84.2 180 top
R67  100K, 1%  [R0402]  80.52,83.19 180 top
R68  100K, 1%  [R0402]  80.52,82.17 180 top
R69  100, 1%  [R0402]  106.17,77.72 0 top
R70  100K, 1%, DNI  [R0402]  87.12,96.39 180 top
R71  100K, 1%  [R0402]  87.12,95.38 180 top
R72  100K, 1%, DNI  [R0402]  87.12,94.36 180 top
R73  100K, 1%, DNI  [R0402]  87.12,92.71 180 top
R74  100K, 1%, DNI  [R0402]  87.12,91.69 180 top
R75  100K, 1%, DNI  [R0402]  87.12,90.68 180 top
R76  100K, 1%, DNI  [R0402]  87.12,89.66 180 top
R77  100K, 1%, DNI  [R0402]  87.12,88.65 180 top
R78  100K, 1%, DNI  [R0402]  87.12,87.63 180 top
R79  100K, 1%, DNI  [R0402]  87.12,86.61 180 top
R80  100K, 1%, DNI  [R0402]  87.12,85.6 180 top
R81  100K, 1%  [R0402]  87.12,84.58 180 top
R82  100K, 1%  [R0402]  87.12,83.57 180 top
R83  100K, 1%  [R0402]  87.12,82.55 180 top
R84  100K, 1%, DNI  [R0402]  87.12,81.53 180 top
R85  100K, 1%, DNI  [R0402]  87.12,80.52 180 top
R86  10K, 1%  [R0402]  41.91,100.33 0 top
R87  10K, 1%  [R0402]  41.91,102.36 0 top
R88  10K, 1%  [R0402]  41.91,103.38 0 top
R89  10K, 1%  [R0402]  41.91,105.41 0 top
R90  10K, 1%  [R0402]  41.91,106.43 0 top
R91  10K, 1%  [R0402]  41.91,101.35 0 top
R92  10K, 1%  [R0402]  41.91,99.31 0 top
R163  100K, DNI  [R0402]  65.81,67.56 0 top
R164  1.5K, 1%  [R0402]  65.81,68.58 180 top
R168  10K  [R0402]  109.22,124.97 270 top
R169  1.5K, 1%  [R0402]  68.05,66.55 180 top
R170  1.5K, 1%  [R0402]  68.05,67.56 180 top
R171  10K  [R0402]  108.33,55.63 270 top
R172  10K  [R0402]  108.33,48.01 270 top
R173  10K  [R0402]  108.33,40.39 270 top
R174  10K  [R0402]  108.33,32.77 270 top
R175  10K  [R0402]  108.33,25.15 270 top
R181  B72520T0300K062  [CT/CN1206]  12.7,52.07 270 top
R182  B72520T0300K062  [CT/CN1206]  12.7,44.45 270 top
R183  B72520T0300K062  [CT/CN1206]  12.7,35.05 270 top
R184  B72520T0300K062  [CT/CN1206]  12.62,27.43 270 top
R185  B72520T0300K062  [CT/CN1206]  12.7,18.03 270 top
R186  B72520T0300K062  [CT/CN1206]  12.7,10.41 270 top
R211  80, 0.1%  [0309/12]  38.1,50.93 180 top
R212  10K, 1%  [R0805]  26.67,50.42 0 top
R213  2K, 1%  [R0805]  26.67,52.45 0 top
R214  10K, 1%  [R0805]  26.67,54.48 0 top
R215  100K  [R0805]  51.44,54.48 0 top
R221  80, 0.1%  [0309/12]  38.1,43.31 180 top
R222  10K, 1%  [R0805]  26.67,42.8 0 top
R223  2K, 1%  [R0805]  26.67,44.83 0 top
R224  10K, 1%  [R0805]  26.67,46.86 0 top
R225  100K  [R0805]  48.01,41.53 180 top
R231  80, 0.1%  [0309/12]  38.1,33.91 180 top
R232  10K, 1%  [R0805]  26.67,33.4 0 top
R233  2K, 1%  [R0805]  26.67,35.43 0 top
R234  10K, 1%  [R0805]  26.67,37.47 0 top
R235  100K  [R0805]  51.44,37.47 0 top
R241  80, 0.1%  [0309/12]  38.1,26.29 180 top
R242  10K, 1%  [R0805]  26.67,25.78 0 top
R243  2K, 1%  [R0805]  26.67,27.81 0 top
R244  10K, 1%  [R0805]  26.67,29.84 0 top
R245  100K  [R0805]  48.01,24.51 180 top
R251  80, 0.1%  [0309/12]  38.1,16.89 180 top
R252  10K, 1%  [R0805]  26.67,16.38 0 top
R253  2K, 1%  [R0805]  26.67,18.41 0 top
R254  10K, 1%  [R0805]  26.67,20.45 0 top
R255  100K  [R0805]  51.44,20.45 0 top
R261  80, 0.1%  [0309/12]  38.1,9.27 180 top
R262  10K, 1%  [R0805]  26.67,8.76 0 top
R263  2K, 1%  [R0805]  26.67,10.79 0 top
R264  10K, 1%  [R0805]  26.67,12.83 0 top
R265  100K  [R0805]  48.01,7.49 180 top
R281  10K  [RN0804]  102.23,89.92 0 top
R282  10K  [RN0804]  102.23,102.11 180 top
R291  10K  [RN0804]  102.23,77.72 0 top
R301  1K  [R0402]  17.27,70.36 90 top
R302  1K  [R0402]  16.26,70.36 90 top
R303  1K, DNI  [R0402]  18.29,64.14 270 top
R304  1K, DNI  [R0402]  15.24,70.36 270 top
R305  150, 1%  [R0805]  16.56,66.04 90 top
R401  1K  [R0402]  17.53,108.58 90 top
R402  1K  [R0402]  22.1,108.58 90 top
R801  1K  [R0402]  97.03,5.08 90 top
R802  1K  [R0402]  99.06,5.08 90 top
RTC1  DS3231MZ+  [SO08]  66.93,72.39 270 top
S1  KMR231GLFS  [SW4SMD_63X161LS]  5.84,107.44 0 top
S2  KMR231GLFS  [SW4SMD_63X161LS]  13.21,107.44 0 top
S11  [P101]  114.81,93.98 180 top
S12  [P101]  114.81,104.78 180 top
S13  [DS-04]  114.81,82.3 90 top
T4  DA2304-AL  [DA230X-AL]  27.94,114.3 90 top
TP1  TPB0,65  [TP_B0,65]  57.15,82.55 0 bottom
TP2  TPB0,65  [TP_B0,65]  58.42,82.55 0 bottom
TP3  TPB0,65  [TP_B0,65]  62.23,82.55 0 bottom
TP4  TPB0,65  [TP_B0,65]  63.5,82.55 0 bottom
TP5  TESTPAD/W_HOLE_1X1  [TESTPAD/W_HOLE_1X1]  91.44,104.14 270 top
TP6  TESTPAD/W_HOLE_1X1  [TESTPAD/W_HOLE_1X1]  91.44,106.68 270 top
TP7  TESTPAD/W_HOLE_1X1  [TESTPAD/W_HOLE_1X1]  93.98,104.14 270 top
TP8  TESTPAD/W_HOLE_1X1  [TESTPAD/W_HOLE_1X1]  93.98,106.68 270 top
TP9  TESTPAD/W_HOLE_1X1  [TESTPAD/W_HOLE_1X1]  35.56,63.5 90 top
TP10  TESTPAD/W_HOLE_1X1  [TESTPAD/W_HOLE_1X1]  35.56,60.96 90 top
TP11  TPB0,65  [TP_B0,65]  68.58,93.98 0 bottom
TP12  TPB0,65  [TP_B0,65]  68.58,91.44 0 bottom
TP13  TPB0,65  [TP_B0,65]  63.5,97.79 0 bottom
TP14  TPB0,65  [TP_B0,65]  67.31,88.9 0 bottom
TP15  TPB0,65  [TP_B0,65]  59.69,86.36 0 bottom
TP16  TPB0,65  [TP_B0,65]  58.42,88.9 0 bottom
TP17  TESTPAD/W_HOLE_1X1  [TESTPAD/W_HOLE_1X1]  52.58,63.5 0 top
TP18  TESTPAD/W_HOLE_1X1  [TESTPAD/W_HOLE_1X1]  52.58,60.96 0 top
TP19  TESTPAD/W_HOLE_1X1  [TESTPAD/W_HOLE_1X1]  66.67,64.77 0 top
TP20  TESTPAD/W_HOLE_1X1  [TESTPAD/W_HOLE_1X1]  66.67,62.23 0 top
TP21  TPB0,65  [TP_B0,65]  60.96,97.79 0 bottom
TP22  TPB0,65  [TP_B0,65]  64.77,97.79 0 bottom
TP23  TPB0,65  [TP_B0,65]  68.58,92.71 0 bottom
TP24  TPB0,65  [TP_B0,65]  68.58,90.17 0 bottom
TP26  TPB0,65  [TP_B0,65]  62.23,97.79 0 bottom
TP31  TPB0,65  [TP_B0,65]  19.81,102.36 0 bottom
TP32  TPB0,65  [TP_B0,65]  49.53,87.63 0 bottom
TP33  TPB0,65  [TP_B0,65]  69.85,95.25 0 bottom
U1  OSD3358-512M-ICB  [OSD335X-BGA-400]  60.96,90.17 270 top
U2  TPD4S012_DRY_6_P1_M  [DRY6]  10.41,101.47 180 top
U4  APX811-31UGSOT  [SOT143-R]  15.47,103.61 180 top
U5  TLVH431  [SOT23-3]  64.77,88.9 270 bottom
U6  SN74LVC2G241_DCU_8  [DCU8]  50.8,67.94 0 top
U16  AT97SC3205T-G3M4400B  [QFN32-0.4-4X4MM]  44.45,61.85 0 top
U27  LAN8710  [LAN8710A-QFN32]  35.56,80.64 0 top
U28  TCAN1051HV  [BEAGLEBONE_BLUE_D8]  74.93,7.11 0 top
U29  MAX3483EESA+T  [21-0041B_8]  24.13,66.04 180 top
U40  ISO3086TDW  [DW16]  45.72,114.3 90 top
U$1  [OSHW_8MM]  57.15,12.7 0 top
U$2  [XYZ-LABEL]  60.96,0.64 0 top
VREG1  LM2596S-5.0  [TO263-5]  73.15,118.11 0 top
VREG2  L7824CV  [78XXL]  85.72,113.92 0 top
VREG4  TPS76350  [DBV5]  36.7,119.76 0 top
X1  10118194-0001LF  [10118194-0001LF(MICRO-USB-B-AMPHENOL-FCI)]  1.45,101.6 180 bottom
X2  J0011D01BNL  [J0011D01BNL]  7.87,83.82 90 top
X3  MC4  [MC4]  8.13,65.02 270 top
X4  CTI-JTAG  [CTI-JTAG]  78.74,68.58 0 top
X5  DM3CS-SF  [DM3CS-SF]  24.13,96.27 270 top
X6  6p-2.54  [H6-2.54]  20.32,60.96 270 top
X7  TH-2X10  [H2X10-2.54]  92.71,90.17 0 top
X8  MC4  [MC4]  113.79,13.97 90 top
X10  MC4  [MC4]  8.13,48.01 270 top
X11  MC4  [MC4]  8.13,30.99 270 top
X12  MC4  [MC4]  8.13,13.97 270 top
X21  MC10  [MC10]  113.79,42.55 90 top
X24  MSTBA2  [MSTBA2]  116.84,116.84 90 top
X41  MSTBA3  [MSTBA3]  5.08,118.11 270 top
Y7  7A-25.000MAAE-T  [CRYSTAL-TXC-7A]  35.56,72.64 180 top

## Library data of the parts
C1 C2 C4 C11 C104 C111 C121 C131 C141 C151 C161 C301 C401-C406 C801 D18 D19 D31-D35 D301 D302 D305 D401 D402 D405 D801 D802 D805 EC30-EC42 ER98-ER120 ER122-ER129 F401 F402 FB7 GDT1 J2-J7 J11-J13 J21-J23 J31-J33 J41-J43 J45 J51-J53 J61-J63 J450 J454 R3 R4 R12 R13 R34 R163 R164 R168-R175 R212-R215 R222-R225 R232-R235 R242-R245 R252-R255 R262-R265 R301-R305 R401 R402 R801 R802 S2 T4 TP1-TP4 TP17-TP20 TP32 TP33 U27 X1 X2 X7 Y7 = OSD3358-SM-RED Platform
C3 C6 C8-C10 C14 C15 C21 C22 C79 C85 C87 C88 D1 D4-D7 FUD1-FUD6 MGT1-MGT4 R10 R18 R22 R25-R31 R33 R39-R41 R53-R92 TP5-TP16 TP21-TP24 U16 U$2 X4 = OSD3358-BSP Ref Design
C100 = OSD3358-SM-RED Platform; MANUFACTURER_PART_NUMBER: UHE1H102MHD6; VENDOR: Nichicon
C101 C102 C105 C106 = SparkFun-Capacitors; PROD_ID: CAP-10300
D3 D403 D404 = diode
F1 = SparkFun-Fuses; PROD_ID: RES-08490
G1 = battery
IC2 = uln-udn
IC4 IC5 = 74xx-eu
IC10-IC12 IC14 = adam - ics
J1 Q1 R5 R6 R8 R11 R15 R20 R21 S1 TP26 TP31 U4 U5 = OSD3358-C-SiP-RED Platform
J24 = OSD3358-SM-RED Platform; MPN: P125-1106A1BS116A1
K1-K5 = relay; MF: FARNELL; MPN: JSM1-12V-5; OC_FARNELL: 910351; OC_NEWARK: 14J1764
L2 = inductor-coilcraft_l
R35 R281 R282 R291 = GHI-BasicComponents
R181-R186 = varistor
R211 R221 R231 R241 R251 R261 = resistor
RTC1 = SparkFun-Clocks; PROD_ID: IC-11985
S11 S12 = switch-dil; OC_FARNELL: unknown; OC_NEWARK: unknown
S13 = switch-dil; OC_FARNELL: 9471570; OC_NEWARK: unknown
U1 = Octavo-Systems
U2 = OSD3358-BSP Ref Design; DATASHEETURL: http://www.ti.com/lit/gpn/TPD4S012; FAMILY_NAME: ESD Solution; GENERIC_PART_NUMBER: TPD4S012; INDUSTRY_STD_PKG_TYPE: SON; MANUFACTURER: Texas Instruments; MANUFACTURER_PART_NUMBER: tpd4s012_dry_6; PACKAGE_DESIGNATOR: DRY; PIN_COUNT: 6; VENDOR: Texas Instruments
U6 = OSD3358-BSP Ref Design; DATASHEETURL: http://www.ti.com/lit/gpn/SN74LVC2G241; FAMILY_NAME: LL BUFFER AND DRIVER WITH 3-STATE OUTPUT; GENERIC_PART_NUMBER: SN74LVC2G241; INDUSTRY_STD_PKG_TYPE: US8; MANUFACTURER: Texas Instruments; MANUFACTURER_PART_NUMBER: sn74lvc2g241_dcu_8; PACKAGE_DESIGNATOR: DCU; PIN_COUNT: 8; VENDOR: Texas Instruments
U28 = BeagleBone_Blue; DATASHEETURL: http://www.ti.com/lit/ds/symlink/tcan1051hv.pdf; DESCRIPTION: CAN Transceiver; FAMILY_NAME: CAN Transceiver; GENERIC_PART_NUMBER: TCAN1051HV; INDUSTRY_STD_PKG_TYPE: SOIC; MANUFACTURER: Texas Instruments; MANUFACTURER_PART_NUMBER: TCAN1051HVD; PACKAGE_DESIGNATOR: D; PIN_COUNT: 8; VENDOR: Texas Instruments
U29 = OSD3358-SM-RED Platform; MANUFACTURER_PART_NUMBER: MAX3483EESA+T; VENDOR: Maxim Integrated Products
U40 = ISO3086TDW; MANUFACTURER_PART_NUMBER: ISO3086TDW; VENDOR: Texas Instruments
U$1 = oshw
VREG1 = linear
VREG2 = v-reg
VREG4 = LP2985A-33DBVR; MANUFACTURER_PART_NUMBER: LP2985A33DBVR; VENDOR: Texas Instruments
X3 X8 X10-X12 X21 = con-phoenix-381_l
X5 = SamacSys_Parts; DESCRIPTION: MicroSD card connector, push-pull type MicroSD card connector, push-pull type; HEIGHT: mm; MANUFACTURER_NAME: Hirose; MANUFACTURER_PART_NUMBER: DM3CS-SF; MOUSER_PART_NUMBER: 798-DM3CSSF; MOUSER_PRICE-STOCK: https://www.mouser.com/Search/Refine.aspx?Keyword=798-DM3CSSF
X6 = OSD3358-BSP Ref Design; MPN: P125-1106A1BS116A1
X24 = con-phoenix-508; MF: FARNELL; MPN: 1757242; OC_FARNELL: 3705171; OC_NEWARK: 71C4161
X41 = con-phoenix-508; MF: FARNELL; MPN: 1757255; OC_FARNELL: 3705183; OC_NEWARK: 71C4162

## Nets
1P8V_REF_1: IC10.8 IC11.8 IC14.1 IC14.2 R212.2 R222.2 R232.2 R242.2
1P8V_REF_2: IC12.8 IC14.6 IC14.7 R252.2 R262.2
5V_OUT: D18.C L2.1 VREG1.2
24VAC: D3.A F1.P$2
24VAC_IN: F1.P$1 X3.4 X24.1
24VDC_AUX: C106.1 D19.1 D31.1 D32.1 D33.1 D34.1 D35.1 IC2.9 J24.3 K1.1 K2.1 K3.1 K4.1 K5.1 VREG2.OUT X8.4
24VDC_UNREG: C100.1 C101.1 D3.C J24.2 VREG1.1
41_A: F401.1 GDT1.2 X41.1
41_B: F402.1 GDT1.1 X41.2
485_A: D305.1 R304.2 R305.2 U29.6 X3.2
485_B: D305.2 R303.1 R305.1 U29.7 X3.3
485_RXD: D402.1 J45.1 U40.5
485_TXD: D401.1 J45.2 U40.8
AGND: C8.2 C9.2 C10.2 C111.2 C121.2 C131.2 C141.2 C151.2 C161.2 IC10.4 IC11.4 IC12.4 J7.1 R25.2 R181.2 R182.2 R183.2 R184.2 R185.2 R186.2 R211.1 R213.2 R215.2 R221.1 R223.2 R225.2 R231.1 R233.2 R235.2 R241.1 R243.2 R245.2 R251.1 R253.2 R255.2 R261.1 R263.2 R265.2 U1.Y9 X10.2 X10.4 X11.2 X11.4 X12.2 X12.4
AIN0: U1.Y10
AIN1: IC10.1 IC10.2 R215.1 U1.W10
AIN2: IC10.6 IC10.7 R225.1 U1.V10
AIN3: IC11.1 IC11.2 R235.1 U1.V9
AIN4: IC11.6 IC11.7 R245.1 U1.Y11
AIN5: IC12.1 IC12.2 R255.1 U1.W11
AIN6: IC12.6 IC12.7 R265.1 U1.V11
AIN7: U1.U12 U1.V12
B03_NO: K3.NO X21.6
B_UART0_RX: R27.2 U6.2 X6.4
B_UART0_TX: U6.3 X6.5
BAT_SENSE: TP6.P$1 U1.E19
BO1_C: K1.C X21.9
BO1_NO: K1.NO X21.10
BO2_C: K2.C X21.7
BO2_NO: K2.NO X21.8
BO3_C: K3.C X21.5
BO4_C: K4.C X21.3
BO4_NO: K4.NO X21.4
BO5_C: K5.C X21.1
BO5_NO: K5.NO X21.2
CAN1_RXD: D802.1 U1.Y7 U28.4
CAN1_TXD: D801.1 U1.W7 U28.1
CAN_H: D805.2 U28.7 X8.3
CAN_L: D805.1 U28.6 X8.2
CGND: MGT1.P$1 MGT2.P$1 MGT3.P$1 MGT4.P$1 R34.2 X1.CGND1 X1.CGND2 X1.CGND3 X1.CGND4 X1.CGND5 X1.CGND6 X2.S1 X2.S2 X5.9 X5.10 X5.11 X5.13
CLKOUT2: C2.2 R3.2 X4.18
CRS: ER124.1 U27.14
E_LED_GRN: U27.3 X2.9
E_LED_YEL: ER120.2 U27.2 X2.12
EEPROM_WP: J1.1 U1.M2
EHRPWM1A: J4.1 U1.C13
EHRPWM1B: U1.A12
EHRPWM2A: J5.1 U1.A17
EHRPWM2B: J6.1 U1.C16
GND: C1.1 C2.1 C3.2 C4.2 C6.1 C11.- C14.2 C15.2 C21.2 C22.2 C79.2 C85.2 C87.2 C88.2 C100.2 C101.2 C102.2 C104.2 C105.2 C106.2 C301.2 C401.2 C404.2 C801.2 D18.A D305.3 D805.3 EC30.2 EC31.2 EC32.2 EC33.2 EC34.2 EC35.2 EC36.2 EC37.2 EC38.2 EC39.2 EC40.2 EC41.2 EC42.2 ER101.2 ER102.2 ER103.2 ER104.2 ER115.1 ER117.1 ER120.1 ER128.1 ER129.2 G1.- IC2.8 IC4.8 IC4.15 IC5.3 IC5.4 IC5.5 IC5.6 IC5.8 IC5.10 IC5.15 IC14.4 J1.2 J2.2 J3.2 J4.2 J5.2 J6.2 J7.2 R6.1 R18.1 R26.2 R27.1 R34.1 R35.1 R35.2 R35.3 R35.4 R39.1 R53.1 R54.1 R55.1 R56.1 R57.1 R58.1 R59.1 R60.1 R61.1 R62.1 R63.1 R64.1 R65.1 R66.1 R67.1 R68.1 R168.2 R281.1 R281.2 R281.3 R281.4 R282.1 R282.2 R282.3 R282.4 R291.1 R291.2 R291.3 R291.4 R301.2 R302.2 R304.1 R401.2 R402.2 R801.2 R802.2 RTC1.5 S1.2 S1.4 S2.1 S2.3 TP8.P$1 U1.A1 U1.A20 U1.D4 U1.D5 U1.D15 U1.D16 U1.D17 U1.E4 U1.E5 U1.E6 U1.E7 U1.E8 U1.E9 U1.E10 U1.E11 U1.E12 U1.E13 U1.E14 U1.E15 U1.E16 U1.E17 U1.F5 U1.F10 U1.F11 U1.F16 U1.F17 U1.G5 U1.G16 U1.H5 U1.H16 U1.J5 U1.J9 U1.J10 U1.J11 U1.J12 U1.J13 U1.J16 U1.K5 U1.K6 U1.K7 U1.K8 U1.K9 U1.K12 U1.K15 U1.K16 U1.L5 U1.L6 U1.L15 U1.L16 U1.M5 U1.M15 U1.M16 U1.N5 U1.N6 U1.N15 U1.N16 U1.P5 U1.P6 U1.P7 U1.P8 U1.P9 U1.P12 U1.P13 U1.P14 U1.P15 U1.P16 U1.R5 U1.R9 U1.R10 U1.R11 U1.R12 U1.R16 U1.T4 U1.T5 U1.T6 U1.T7 U1.T8 U1.T9 U1.T10 U1.T11 U1.T12 U1.T13 U1.T14 U1.T15 U1.T16 U1.T17 U1.U4 U1.U5 U1.U15 U1.U16 U1.U17 U1.W13 U1.Y1 U1.Y20 U2.4 U4.1 U6.1 U6.4 U16.2 U16.5 U16.6 U16.9 U16.18 U16.19 U16.20 U16.21 U16.23 U16.24 U16.32 U27.33 U28.2 U29.5 U40.3 VREG1.3 VREG1.5 VREG1.6 VREG2.GND X1.GND X2.8 X3.1 X4.4 X4.8 X4.10 X4.12 X4.16 X4.20 X5.6 X6.1 X8.1 X24.2
GPIO0_7: U1.V15 U29.2 U29.3
GPIO0_18: U1.K3
GPIO1_12: IC2.2 U1.C15
GPIO1_13: IC2.3 U1.B15
GPIO1_14: IC2.4 U1.A15
GPIO1_15: IC2.5 U1.C14
GPIO1_16: U1.B14
GPIO1_17: IC2.1 U1.B13
GPIO1_28: U1.C9
I2C0_SCL: R12.1 TP18.P$1 U1.U8 U1.V8 U16.29
I2C0_SDA: R13.1 TP17.P$1 U1.U7 U1.V7 U16.30
I2C2_SCL: R169.1 RTC1.8 TP20.P$1 U1.Y8
I2C2_SDA: R170.1 RTC1.7 TP19.P$1 U1.W8
ISO_485_A: D405.1 F401.3 U40.11 U40.14
ISO_485_B: D405.2 F402.3 U40.12 U40.13
ISO_GND: C402.2 C403.2 C405.2 C406.- D405.3 GDT1.3 T4.P$6 T4.P$7 U40.9 U40.15 VREG4.2 X41.3
ISO_VCC: C402.1 C406.+ U40.16 VREG4.5
ISO_VIN: C403.1 C405.1 D403.C D404.C VREG4.1 VREG4.3
JTAG_EMU0: R40.1 U1.V18 X4.13
JTAG_EMU1: R41.1 U1.V19 X4.14
JTAG_TCK: U1.Y19 X4.9 X4.11
JTAG_TDI: U1.Y18 X4.3
JTAG_TDO: U1.W18 X4.7
JTAG_TMS: U1.W19 X4.1
JTAG_TRSTN: R39.2 U1.W20 X4.2
LCD_DATA0: R68.2 R85.1 U1.T18 X7.19
LCD_DATA1: R67.2 R84.1 U1.T19 X7.20
LCD_DATA2: R66.2 R69.1 R83.1 U1.T20 X7.17
LCD_DATA3: R65.2 R82.1 U1.R18 X7.18
LCD_DATA4: R64.2 R81.1 U1.R19 X7.15
LCD_DATA5: R63.2 R80.1 U1.R20 X7.16
LCD_DATA6: R62.2 R79.1 U1.P18 X7.13
LCD_DATA7: R61.2 R78.1 U1.P19 X7.14
LCD_DATA8: R60.2 R77.1 U1.P20 X7.11
LCD_DATA9: R59.2 R76.1 U1.N18 X7.12
LCD_DATA10: R58.2 R75.1 U1.N19 X7.10
LCD_DATA11: R57.2 R74.1 U1.N20 X7.8
LCD_DATA12: R56.2 R73.1 U1.M18 X7.9
LCD_DATA13: R55.2 R72.1 U1.M19 X7.7
LCD_DATA14: R54.2 R71.1 U1.M20 X7.5
LCD_DATA15: R53.2 R70.1 U1.L18 X7.6
LCD_DE: R28.2 X7.4
LCD_HSYNC: R29.2 X7.3
LCD_PCLK: R31.2 X7.2
LCD_VSYNC: R30.2 X7.1
LDO_PGOOD: TP22.TP U1.D13 U1.D14
MDIO_CLK: U1.W1 U27.17
MDIO_DATA: ER105.2 U1.V1 U27.16
MII1_COL: ER123.2 U1.R2
MII1_CRS: ER124.2 U1.R3
MII1_RXCLK: ER116.2 U1.T1
MII1_RXD0: ER113.2 U1.T3
MII1_RXD1: ER112.2 U1.U1
MII1_RXD2: ER111.2 U1.U2
MII1_RXD3: ER110.2 U1.U3
MII1_RXDV: ER114.2 U1.R1
MII1_RXERR: ER118.2 U1.T2
MII1_TXCLK: ER119.2 U1.N1
MII1_TXD0: U1.N2 U27.22
MII1_TXD1: U1.N3 U27.23
MII1_TXD2: U1.P1 U27.24
MII1_TXD3: U1.P2 U27.25
MII1_TXEN: U1.P3 U27.21
MMC0_CD: R92.1 U1.V4 X4.19 X5.12
MMC0_CLK: R88.1 U1.W3 X5.5
MMC0_CMD: R87.1 U1.W2 X5.3
MMC0_DAT0: R89.1 U1.Y3 X5.7
MMC0_DAT1: R90.1 U1.V3 X5.8
MMC0_DAT2: R86.1 U1.V2 X5.1
MMC0_DAT3: R91.1 U1.Y2 X5.2
MODE2: ER99.2 ER123.1 U27.15
N$1: R10.1 X1.VBUS
N$2: D7.2 R35.8
N$3: D31.2 R171.1
N$5: D802.2 R802.1
N$6: D801.2 R801.1
N$7: J51.1 J52.1 R185.1 R254.1 X12.1
N$8: D1.2 R26.1
N$9: TP33.TP U1.F18
N$10: ER117.2 X2.10
N$11: D6.2 R35.7
N$13: D5.2 R35.6
N$14: J11.1 J12.1 R181.1 R214.1 X10.1
N$15: D4.2 R35.5
N$17: C105.1 J24.1 VREG2.IN
N$19: D301.2 R301.1
N$20: D302.2 R302.1
N$37: C151.1 IC12.3 J53.1 R254.2
N$38: J51.2 R251.2
N$39: J53.2 R253.1
N$40: J52.2 R252.1
N$41: J61.1 J62.1 R186.1 R264.1 X12.3
N$43: C161.1 IC12.5 J63.1 R264.2
N$44: J61.2 R261.2
N$45: J11.2 R211.2
N$46: J12.2 R212.1
N$50: J63.2 R263.1
N$51: J62.2 R262.1
N$52: D401.2 R401.1
N$54: J13.2 R213.1
N$55: J21.1 J22.1 R182.1 R224.1 X10.3
N$56: C121.1 IC10.5 J23.1 R224.2
N$60: C111.1 IC10.3 J13.1 R214.2
N$61: J21.2 R221.2
N$62: J23.2 R223.1
N$63: J22.2 R222.1
N$66: J31.1 J32.1 R183.1 R234.1 X11.1
N$67: C131.1 IC11.3 J33.1 R234.2
N$68: J31.2 R231.2
N$69: J33.2 R233.1
N$70: R31.1 U1.U20
N$71: J32.2 R232.1
N$72: R30.1 U1.U18
N$73: J41.1 J42.1 R184.1 R244.1 X11.3
N$74: C141.1 IC11.5 J43.1 R244.2
N$75: J41.2 R241.2
N$76: J43.2 R243.1
N$78: J42.2 R242.1
N$83: R29.1 U1.U19
N$85: R28.1 U1.V20
N$86: D402.2 R402.1
N$87: D403.A T4.P$8
N$88: D404.A T4.P$5
N$89: T4.P$1 U40.1
N$90: T4.P$4 U40.2
N$93: D19.2 R168.1
N$94: EC40.1 ER122.2 X2.4 X2.5
N$97: IC4.6 R282.5 S12.8
N$98: IC4.5 R282.6 S12.4
N$99: IC4.4 R282.7 S12.2
N$100: IC4.3 R282.8 S12.1
N$101: IC4.14 R281.5 S11.8
N$102: IC4.13 R281.6 S11.4
N$103: IC4.12 R281.7 S11.2
N$104: IC4.11 R281.8 S11.1
N$105: IC4.10 IC5.9
N$106: IC5.11 R291.8 S13.8
N$107: IC5.12 R291.7 S13.7
N$108: IC5.13 R291.6 S13.6
N$109: IC5.14 R291.5 S13.5
N$110: G1.+ RTC1.6
N$111: J3.1 R69.2
N$112: D32.2 R172.1
N$113: ER126.1 U27.5
N$114: EC42.1 ER125.2 ER126.2 Y7.P$2
N$115: EC41.1 ER127.2 Y7.P$1
N$116: ER125.1 ER127.1 U27.4
N$117: ER128.2 U27.32
N$118: ER129.1 U27.18
N$119: IC2.16 K1.2 R171.2
N$120: IC2.15 K2.2 R172.2
N$121: D33.2 R173.1
N$122: D34.2 R174.1
N$123: D35.2 R175.1
N$124: IC2.14 K3.2 R173.2
N$125: EC33.1 EC35.1 U27.6
N$126: ER115.2 X2.11
N$128: IC2.13 K4.2 R174.2
N$129: IC2.12 K5.2 R175.2
N$130: R15.2 R20.1 U5.1
N$131: Q1.B R21.1 U5.2
N$133: R4.1 U1.W14
N$134: R11.1 S1.1 S1.3
N$135: R8.2 U4.2
N$137: R5.2 R11.2 U4.3
N$138: R3.1 U1.V14
OSC1_IN: R164.2 RTC1.1 U1.Y13
OSC1_OUT: U1.Y14
OSC_CTL: TP32.TP U1.M1
PMIC_INT: TP24.TP U1.J17 U1.K17
PMIC_MUX_IN: R18.2 R22.1 U1.F19
PMIC_NRESET: J2.1 U1.A19
PMIC_NWAKEUP: TP23.TP U1.G17 U1.H17
PMIC_PGOOD: TP26.TP U1.D11 U1.D12
PR1_PRU0_PRU_R30_6: U1.V17 U40.6
PR1_PRU0_PRU_R30_7: U1.V16 U40.7
PR1_UART0_RXD: J450.1 U1.W4
PR1_UART0_TXD: J450.2 U1.Y4
PWR_BUT: S2.2 S2.4 U1.A18
PWR_EN: TP21.TP U1.D9 U1.D10
PWRONRSTN: R5.1 U1.C17
RTC_RST: R163.1 RTC1.4 U1.K20
RX_CLK: ER104.1 ER116.1 U27.7
RX_DV: ER114.1 U27.26
RX_ERR: ER101.1 ER118.1 U27.13
RX_N: EC37.1 ER107.2 U27.30 X2.6
RX_P: EC36.1 ER106.2 U27.31 X2.3
RXD0: ER98.2 ER113.1 U27.11
RXD1: ER100.2 ER112.1 U27.10
RXD2: ER103.1 ER111.1 U27.9
RXD3: ER102.1 ER110.1 U27.8
SPI1_CS0: IC4.1 IC5.1 U1.W17
SPI1_D0: IC4.9 U1.Y16
SPI1_D1: U1.W16
SPI1_SCLK: IC4.2 IC5.2 U1.Y17
SYS_ADC_1P8V: C10.1 IC14.3 IC14.5 R33.2 U1.Y12
SYS_RESETN: C14.1 R6.2 R8.1 TP31.TP U1.B17 U16.17 U27.19 X4.15
SYS_RTC_1P8V: Q1.C R15.1 TP14.TP U1.K13 U1.K14 U1.L13 U1.L14 U1.M13 U1.M14 U5.3
SYS_VDD1_3P3V: C6.2 C15.1 C21.1 C22.1 C79.1 C85.1 C87.1 C88.1 C104.1 C301.1 C401.1 C404.1 C801.1 EC34.1 ER98.1 ER99.1 ER100.1 ER105.1 FB7.1 IC4.16 IC5.16 IC14.8 R12.2 R13.2 R22.2 R40.2 R41.2 R70.2 R71.2 R72.2 R73.2 R74.2 R75.2 R76.2 R77.2 R78.2 R79.2 R80.2 R81.2 R82.2 R83.2 R84.2 R85.2 R86.2 R87.2 R88.2 R89.2 R90.2 R91.2 R92.2 R163.2 R164.1 R169.2 R170.2 R303.2 RTC1.2 S11.C S12.C S13.1 S13.2 S13.3 S13.4 T4.P$2 T4.P$3 TP12.TP U1.F8 U1.F9 U1.G8 U1.G9 U1.H7 U1.H8 U1.H14 U1.H15 U1.J7 U1.J8 U1.J14 U1.J15 U4.4 U6.7 U6.8 U16.1 U16.8 U16.22 U27.12 U28.3 U29.8 U40.4 X4.5 X5.4
SYS_VDD2_3P3V: D1.1 TP13.TP U1.F12 U1.F13 U1.G12 U1.G13
SYS_VDD3_3P3V: Q1.E R20.2 R21.2 TP16.TP U1.K10 U1.K11 U1.L7 U1.L8 U1.L9 U1.L10 U1.L11 U1.L12 U1.M7 U1.M8 U1.M9 U1.M10 U1.M11 U1.M12
SYS_VDD_1P8V: TP15.TP U1.N7 U1.N8 U1.N9 U1.N10 U1.N11 U1.N12 U1.N13 U1.N14 U1.P10 U1.P11
SYS_VOUT: C4.1 TP11.TP U1.F14 U1.F15 U1.G14 U1.G15
TEMP_SENSE: TP7.P$1 U1.E20
TPM_GPIO0: U1.W15 U16.12
TPM_GPIO1: TP9.P$1 U1.V6 U16.3
TPM_GPIO2: TP10.P$1 U1.V5 U16.4
TX_CLK: ER119.1 U27.20
TX_N: EC39.1 ER109.2 U27.28 X2.2
TX_P: EC38.1 ER108.2 U27.29 X2.1
UART0_RX: U1.Y6 U6.6
UART0_TX: U1.W6 U6.5
UART2_RXD: D302.1 U1.Y5 U29.1
UART2_TXD: D301.1 U1.W5 U29.4
UART4_RXD: J454.1 U1.B9
UART4_TXD: J454.2 U1.A9
USB0_ID: U1.L1 U2.3 X1.ID
USB0_N: U1.K2 U2.1 X1.D-
USB0_P: U1.L2 U2.2 X1.D+
USR0: D7.1 U1.C12
USR1: D6.1 U1.A11
USR2: D5.1 U1.B11
USR3: D4.1 U1.C11
VDD_5V: C11.+ C102.1 L2.2 U1.C18 U1.C19 U1.C20 VREG1.4
VDD_BAT: TP5.P$1 U1.D18 U1.D19 U1.D20
VDD_CORE: TP4.TP U1.U13
VDD_ETH_PHY: EC30.1 EC31.1 EC32.1 ER106.1 ER107.1 ER108.1 ER109.1 ER122.1 FB7.2 U27.1 U27.27
VDD_MPU: TP1.TP U1.U6
VDD_USB_5V: C3.1 R10.2 U1.B18 U1.B19 U1.B20 U1.K1 U2.6
VDDS_DDR: TP2.TP U1.U9
VDDS_PLL: TP3.TP U1.U10
VIO: U28.5
VREFN: R25.1 U1.W9
VREFP: C8.1 C9.1 R33.1 U1.W12
XDMA_EVENT_INTR0: C1.2 R4.2 X4.17

## Tracks (layer width: path | path; a pad name or v marks a point on that pad's centre or on a via)
1P8V_REF_1  (via drill 0.3)
  Top 0.305: v28.98,50.42 R212.2 | v28.98,42.8 R222.2 | v28.98,33.4 R232.2 | v28.98,25.78 R242.2
  Bottom 0.305: v51.44,43.23 49.84,44.83 31.01,44.83 v28.98,42.8 | v28.98,50.42 30.5,48.9 50.16,48.9 51.44,47.62 v51.44,46.46 | v28.98,33.4 30.5,31.88 50.16,31.88 51.44,30.61 v51.44,29.44 | v28.98,25.78 31.01,27.81 49.84,27.81 v51.44,26.21
  pour Top: 56.52,32.84 56.52,46.84 56.26,47.09 51.05,47.09 50.8,46.84 50.8,42.85 51.05,42.6 54.61,42.6 54.86,42.34 54.86,30.33 54.61,30.07 51.05,30.07 50.8,29.82 50.8,25.83 51.05,25.58 54.61,25.58 54.86,25.32 54.86,13.72 55.12,13.46 68.07,13.46 68.33,13.72 68.33,18.41 68.07,18.67 65.05,18.67 64.8,18.41 64.8,15.8 64.54,15.54 58.42,15.54 57.78,16.18 57.78,31.57
1P8V_REF_2  (via drill 0.3)
  Top 0.305: R262.2 v28.98,8.76 | v28.98,16.38 R252.2
  Bottom 0.305: v28.98,8.76 31.01,10.79 49.84,10.79 v51.44,9.2 | v28.98,16.38 30.5,14.86 50.16,14.86 51.44,13.59 v51.44,12.42
  pour Top: 51.05,8.56 65.76,8.56 66.01,8.81 66.01,12.8 65.76,13.06 51.05,13.06 50.8,12.8 50.8,8.81
5V_OUT
  pour Top (rank 2): 72.06,114.45 72.06,109.75 71.78,109.47 65.51,109.47 65.1,109.07 65.1,107.95 64.85,107.7 60.96,107.7 60.71,107.95 60.71,124.21 60.96,124.46 66.8,124.46 67.06,124.21 67.06,115.06 67.31,114.81 71.7,114.81
24VAC
  pour Top: 108.71,107.7 108.94,107.7 109.19,107.95 109.19,110.49 108.94,110.74 106.38,110.74 106.12,110.49 106.12,107.7 105.41,107.7 105.16,107.44 105.16,103.84 105.41,103.58 108.46,103.58 108.71,103.84
24VAC_IN
  pour Bottom: 104.6,107.92 104.6,110.36 105.23,111 114.3,111 115.57,112.27 115.57,115.06 114.3,116.33 103.76,116.33 103.12,115.7 103.12,112.78 102.49,112.14 100.84,112.14 100.58,111.89 100.58,107.92 100.84,107.67 104.34,107.67
  pour Route15 (isolate 0.254, rank 2): 114.3,111 104.39,111 103.12,112.27 103.12,125.09 100.58,127.64 6.99,127.64 6.35,127 6.35,61.85 6.99,61.21 10.36,61.21 11,60.58 11,57.78 10.36,57.15 0.76,57.15 0.13,57.78 0.13,129.41 105.92,129.41 107.19,128.14 107.19,117.6 108.46,116.33 114.3,116.33 115.57,115.06 115.57,112.27
24VDC_AUX  (via drill 0.3)
  Top 0.203: VREG2.OUT 94.49,110.11 95.76,111.38 95.76,125.6 97.03,126.87 D19.1
  Top 0.254: K1.1 101.98,56.8
  Top 0.305: K2.1 80.52,55.37 100.55,55.37 101.98,56.8 | K4.1 80.52,38.86 100.52,38.86 K3.1 107.76,46.1 109.84,46.1 | K5.1 105.11,23.78 106.38,25.05 106.38,29.59 107.64,30.86 109.84,30.86
  Top 0.508: VREG2.OUT C106.1
  other vias: 95.89,64.64 96.9,64.64 94.87,64.64 102.62,65.02 101.6,65.02 102.62,64.01 101.6,64.01 101.6,62.99 102.62,62.99
  pour Top: 97.54,65.48 97.54,64.52 97.28,64.26 94.36,64.26 94.11,64.52 94.11,65.48 94.36,65.74 97.28,65.74
  pour Bottom: 97.41,104.14 99.57,104.14 99.82,103.89 99.82,100.33 99.57,100.08 97.54,100.08 97.28,99.82 97.28,66.8 98.55,65.53 102.87,65.53 103.12,65.28 103.12,62.99 102.87,62.74 94.36,62.74 94.11,62.99 94.11,65.48 95.25,66.62 95.25,107.31 94.61,107.95 87.17,107.95 86.92,108.2 86.92,111.76 87.17,112.01 96.52,112.01 97.16,111.38 97.16,104.39
  pour Top: 100.08,57.58 100.08,55.75 100.71,55.12 103,55.12 103.63,55.75 103.63,59.94 103.89,60.2 109.35,60.2 109.6,59.94 109.6,18.41 110.24,17.78 116.2,17.78 116.84,18.41 116.84,20.95 116.2,21.59 111.89,21.59 111.25,22.23 111.25,62.1 110.62,62.74 103.38,62.74 103.12,62.99 103.12,65.28 102.87,65.53 101.45,65.53 101.19,65.28 101.19,58.7
24VDC_UNREG  (via drill 0.3)
  other vias: 68.58,111.76 68.58,112.78 68.58,110.74 97.03,115.19 97.03,114.17 98.04,114.17 98.04,115.19 98.04,116.2 97.03,116.2 67.56,112.78 66.55,112.78
  pour Top: 65.91,110.46 70.1,110.46 70.36,110.72 70.36,113.41 65.91,113.41 65.66,113.16 65.66,110.72
  pour Bottom: 65.91,110.46 81.53,110.46 81.79,110.72 81.79,112.14 83.19,113.54 101.47,113.54 101.73,113.79 101.73,117.22 101.47,117.47 79.63,117.47 79.25,117.09 79.25,115.06 78.99,114.81 65.91,114.81 65.66,114.55 65.66,110.72
  pour Top (isolate 0.305): 104.6,103.84 104.6,107.42 104.34,107.67 100.84,107.67 100.58,107.92 100.58,110.74 100.84,111 103.96,111 104.6,111.63 104.6,117.22 104.34,117.47 96.52,117.47 96.27,117.22 96.27,103.84 96.52,103.58 104.34,103.58
41_A
  Bottom 1.27: X41.1 13.16,123.19 14.43,124.46 GDT1.2